# EAGLE board Logic_Level_Converter-GiantPanel-v13 (EAGLE 6.4), part 1 of 9
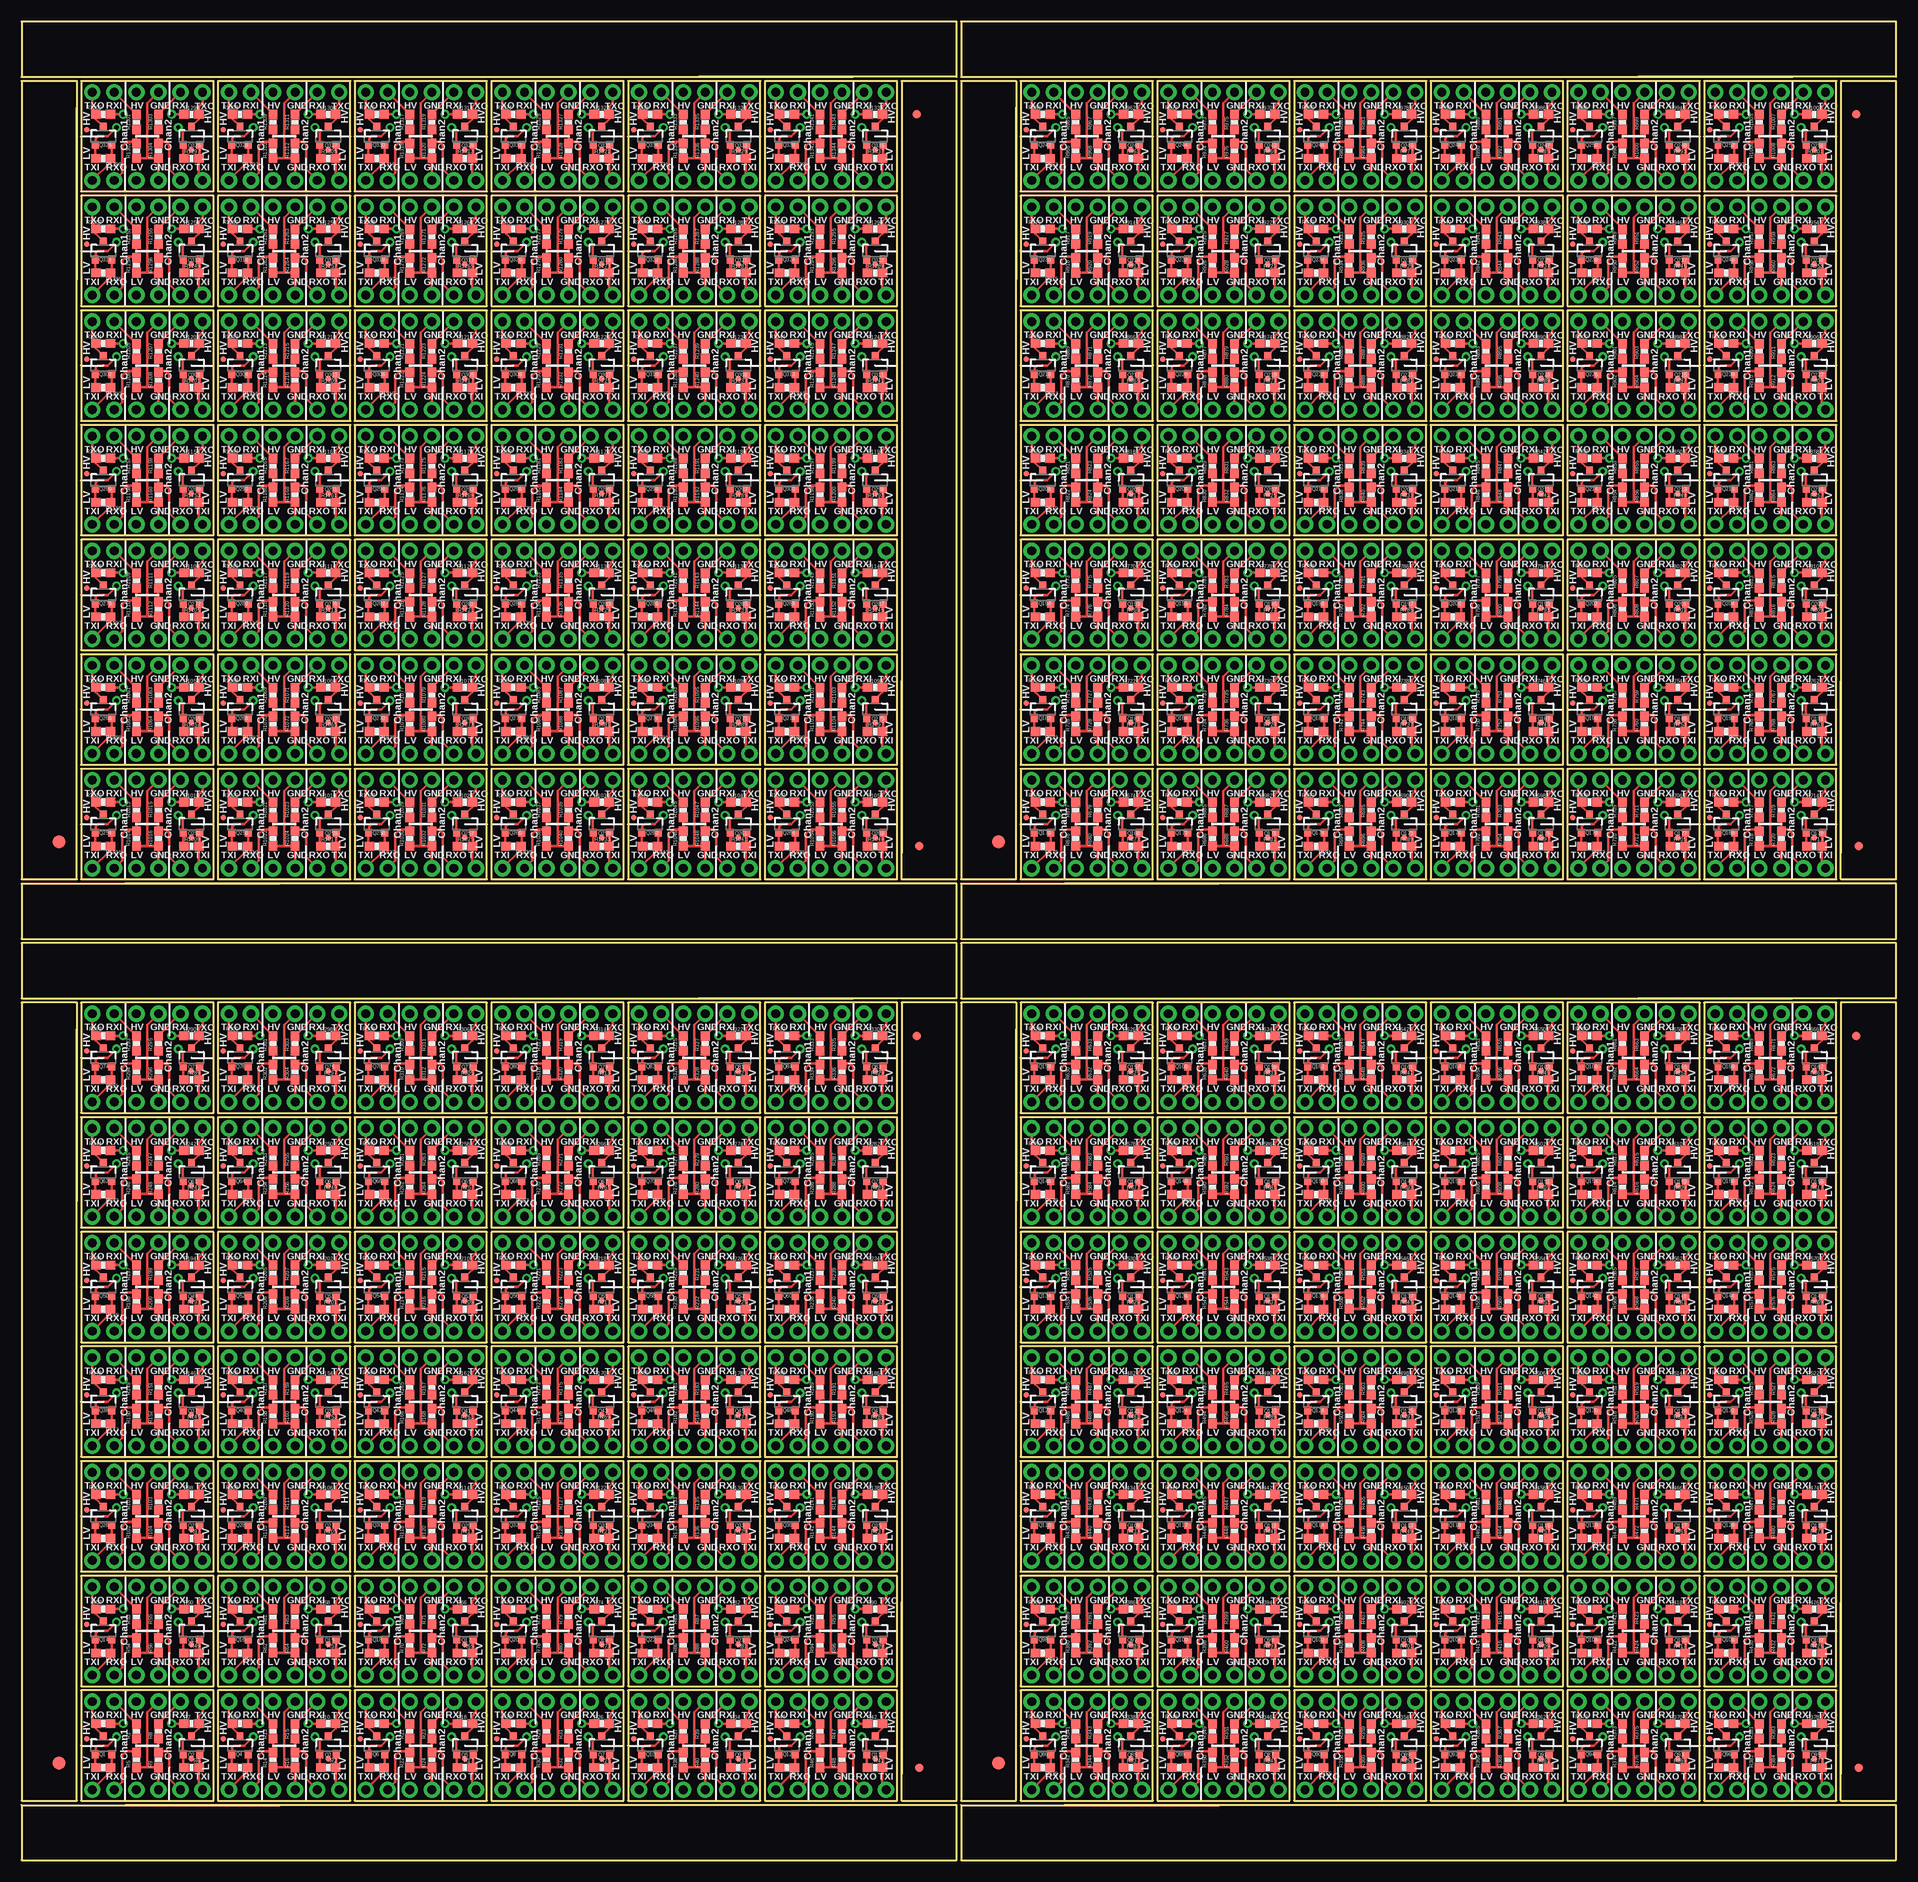
[diagram p0: board, top side]
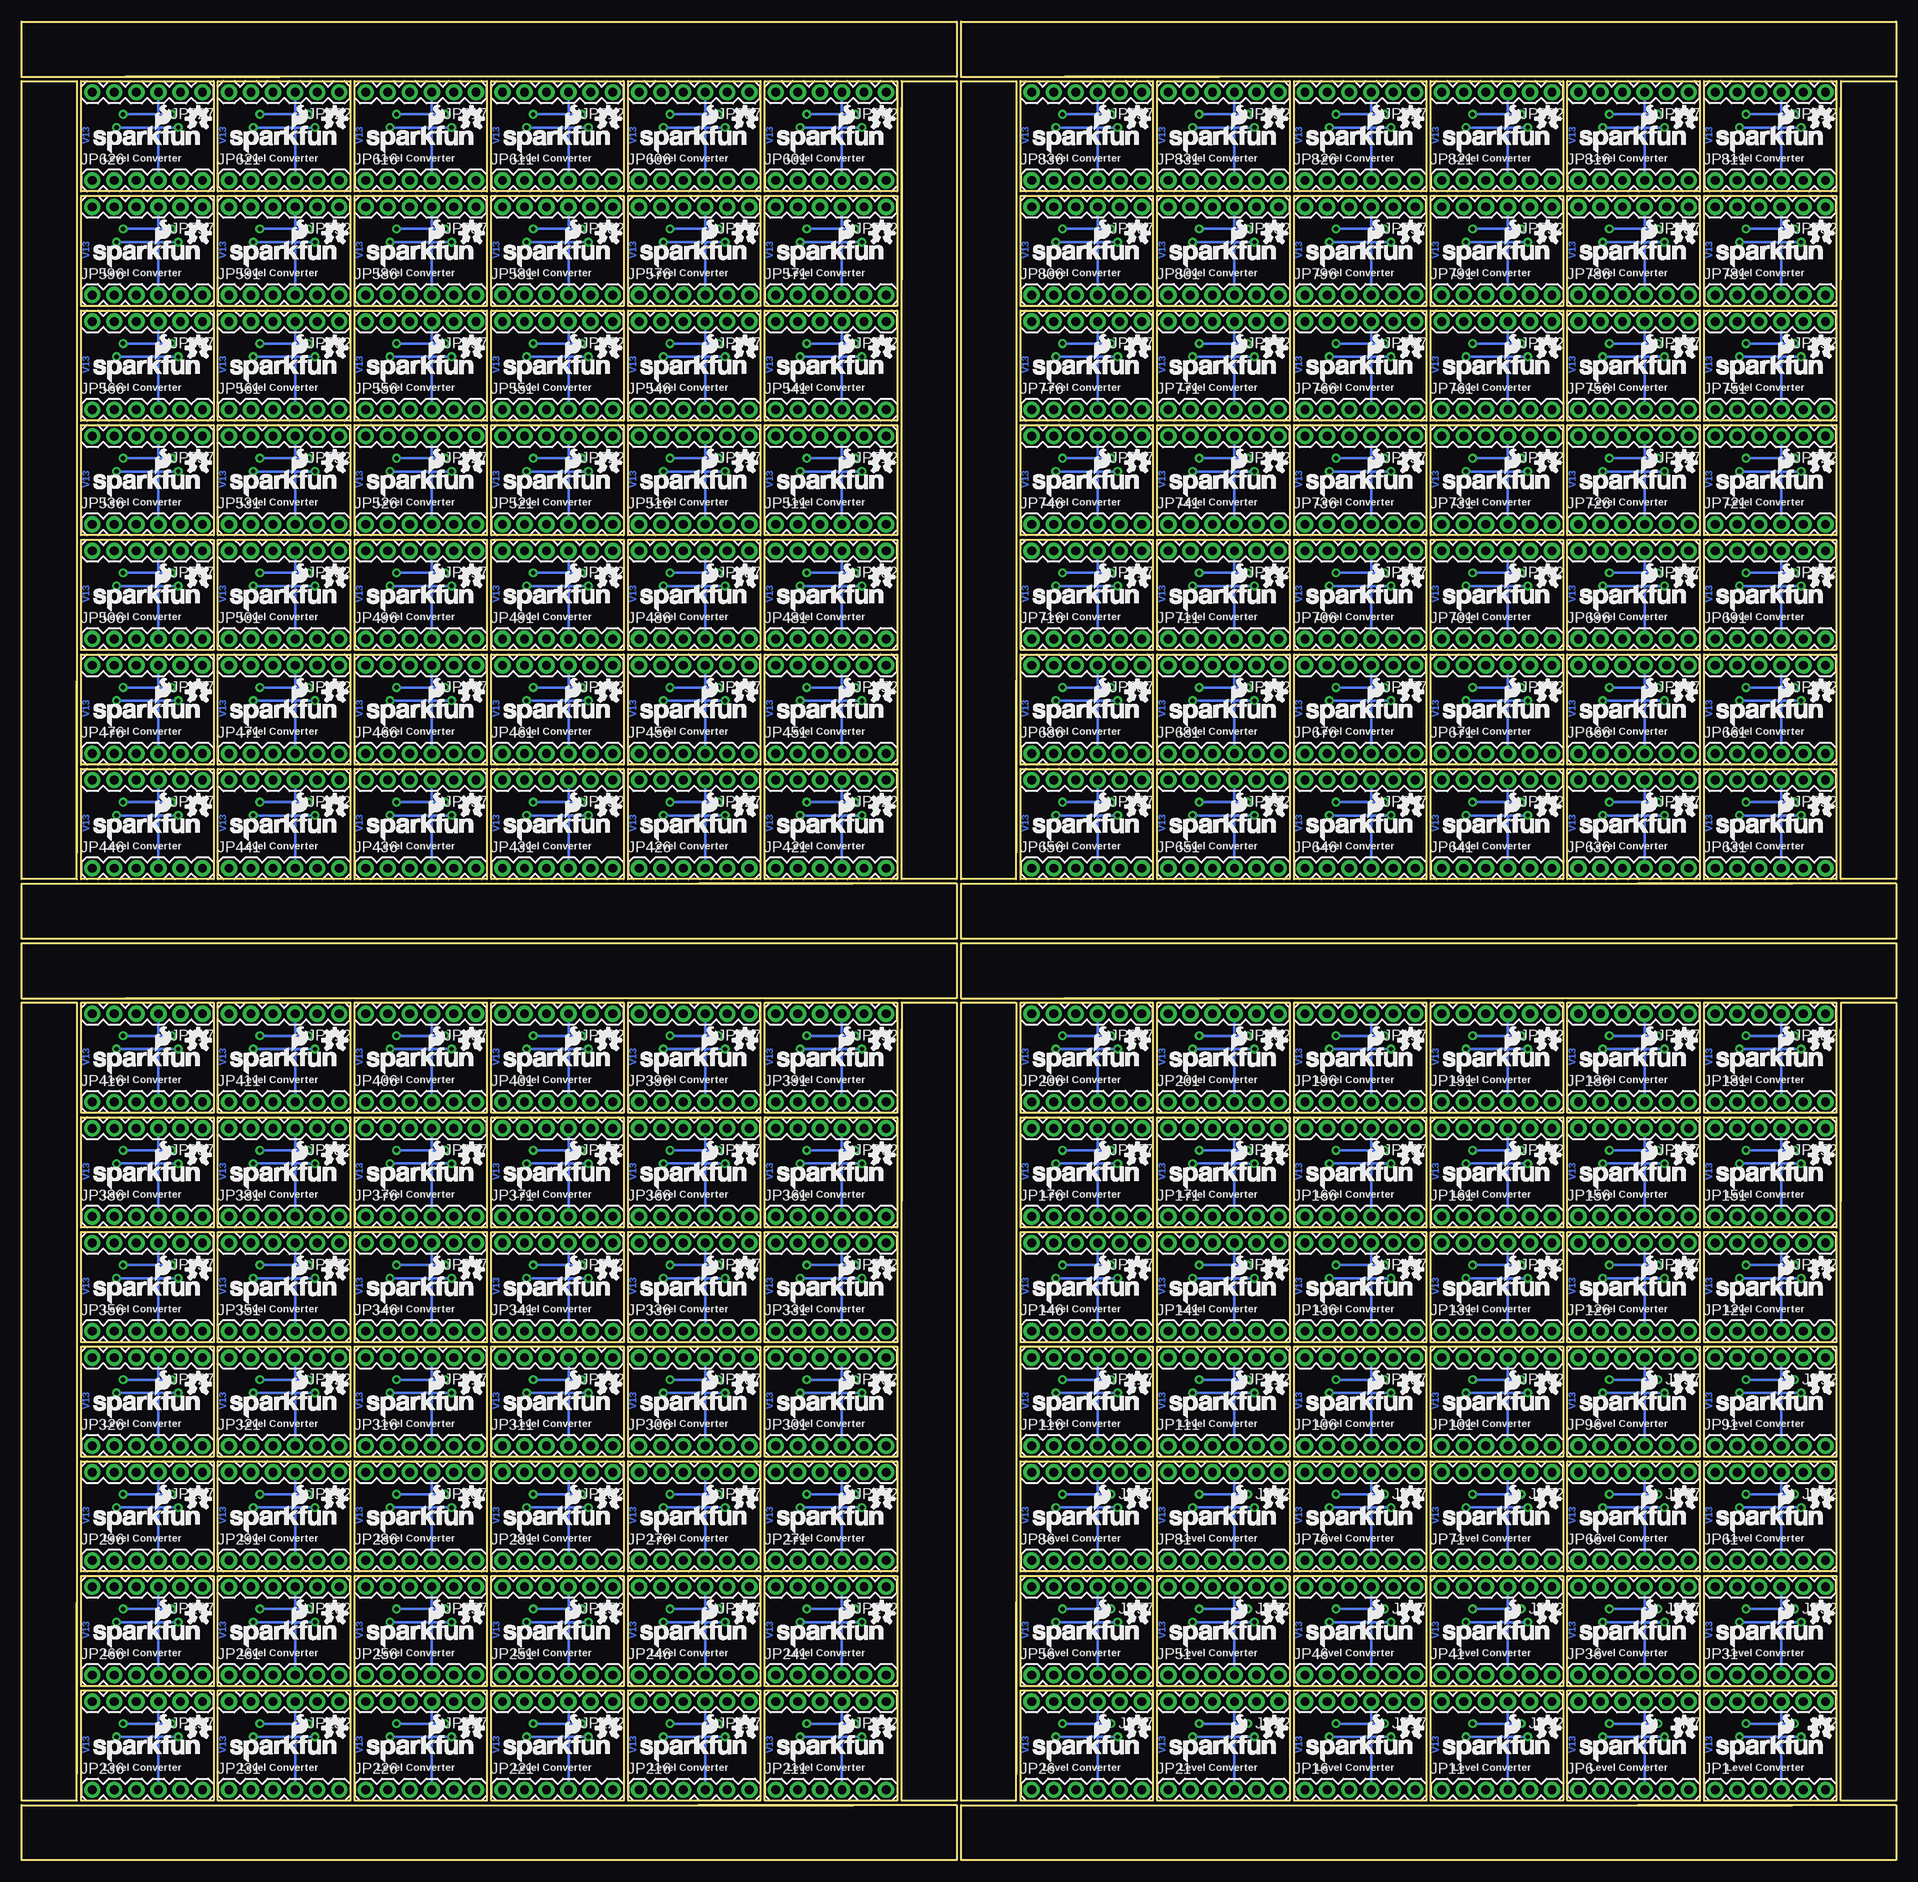
[diagram p1: board, bottom side, seen from below]

Size 215.9 x 211.84 mm. Coordinates in mm from the lower left corner, seen from the top.
Outline: 752 segments
Copper layers (1*16): Top 0.035mm / dielectric 1.5mm / Bottom 0.035mm
Design rules "SparkFun *": minimum track width 7mil, minimum drill 15mil, track to track 8mil, track to pad 8mil, pad to pad 8mil, via to via 8mil, smd to smd 8mil, copper to edge 8mil, drill to drill 8mil, minimum pad ring 12mil, minimum via ring 10mil, stop-mask expansion 4mil, vias tented up to drill 20mil, thermal gap 10mil

## Footprints (pad centres in the part's own frame; a part is rotated, then mirrored left to right if it is on the bottom)
FIDUCIAL-1.5X3 = smd 1.5 x 1.5: 1 0,0
FIDUCIAL-1X2 = smd 1 x 1: 1 0,0
1X06 = drill 1.016 pad 1.88: 1 0,0; 2 2.54,0; 3 5.08,0; 4 7.62,0; 5 10.16,0; 6 12.7,0
MICRO-FIDUCIAL = smd 0.635 x 0.635: 1 0,0
SOT23-3 = smd 0.8 x 0.9: 1 -0.95,-1; 2 0.95,-1; 3 0,1.1
0603-RES = smd 1.1 x 1: 1 -0.85,0; 2 0.85,0

## Placement (x,y rotation side)
E$1  [FIDUCIAL-1.5X3]  4.32,11.18 0 top
E$2  [FIDUCIAL-1X2]  211.58,10.67 0 top
E$3  [FIDUCIAL-1X2]  211.33,95 180 top
E$4  [FIDUCIAL-1X2]  103.38,10.67 0 top
E$5  [FIDUCIAL-1X2]  103.12,95 180 top
E$6  [FIDUCIAL-1.5X3]  112.52,11.18 0 top
E$7  [FIDUCIAL-1X2]  211.58,116.84 0 top
E$8  [FIDUCIAL-1X2]  211.33,201.17 180 top
E$9  [FIDUCIAL-1.5X3]  112.52,117.35 0 top
E$10  [FIDUCIAL-1X2]  103.38,116.84 0 top
E$11  [FIDUCIAL-1X2]  103.12,201.17 180 top
E$12  [FIDUCIAL-1.5X3]  4.32,117.35 0 top
JP1  [1X06]  20.83,8.13 0 bottom
JP2  [1X06]  8.13,18.29 180 bottom
JP3  FIDUCIALUFIDUCIAL  [MICRO-FIDUCIAL]  19.56,11.68 0 top
JP4  FIDUCIALUFIDUCIAL  [MICRO-FIDUCIAL]  7.49,13.97 0 top
JP5  LOGO-SFENW2  [SFE-NEW-WEB]  20.7,11.3 0 bottom
JP6  [1X06]  36.58,8.13 0 bottom
JP7  [1X06]  23.88,18.29 180 bottom
JP8  FIDUCIALUFIDUCIAL  [MICRO-FIDUCIAL]  35.31,11.68 0 top
JP9  FIDUCIALUFIDUCIAL  [MICRO-FIDUCIAL]  23.24,13.97 0 top
JP10  LOGO-SFENW2  [SFE-NEW-WEB]  36.45,11.3 0 bottom
JP11  [1X06]  52.32,8.13 0 bottom
JP12  [1X06]  39.62,18.29 180 bottom
JP13  FIDUCIALUFIDUCIAL  [MICRO-FIDUCIAL]  51.05,11.68 0 top
JP14  FIDUCIALUFIDUCIAL  [MICRO-FIDUCIAL]  38.99,13.97 0 top
JP15  LOGO-SFENW2  [SFE-NEW-WEB]  52.2,11.3 0 bottom
JP16  [1X06]  68.07,8.13 0 bottom
JP17  [1X06]  55.37,18.29 180 bottom
JP18  FIDUCIALUFIDUCIAL  [MICRO-FIDUCIAL]  66.8,11.68 0 top
JP19  FIDUCIALUFIDUCIAL  [MICRO-FIDUCIAL]  54.74,13.97 0 top
JP20  LOGO-SFENW2  [SFE-NEW-WEB]  67.94,11.3 0 bottom
JP21  [1X06]  83.82,8.13 0 bottom
JP22  [1X06]  71.12,18.29 180 bottom
JP23  FIDUCIALUFIDUCIAL  [MICRO-FIDUCIAL]  82.55,11.68 0 top
JP24  FIDUCIALUFIDUCIAL  [MICRO-FIDUCIAL]  70.48,13.97 0 top
JP25  LOGO-SFENW2  [SFE-NEW-WEB]  83.69,11.3 0 bottom
JP26  [1X06]  99.57,8.13 0 bottom
JP27  [1X06]  86.87,18.29 180 bottom
JP28  FIDUCIALUFIDUCIAL  [MICRO-FIDUCIAL]  98.3,11.68 0 top
JP29  FIDUCIALUFIDUCIAL  [MICRO-FIDUCIAL]  86.23,13.97 0 top
JP30  LOGO-SFENW2  [SFE-NEW-WEB]  99.44,11.3 0 bottom
JP31  [1X06]  20.83,21.34 0 bottom
JP32  [1X06]  8.13,31.5 180 bottom
JP33  FIDUCIALUFIDUCIAL  [MICRO-FIDUCIAL]  19.56,24.89 0 top
JP34  FIDUCIALUFIDUCIAL  [MICRO-FIDUCIAL]  7.49,27.18 0 top
JP35  LOGO-SFENW2  [SFE-NEW-WEB]  20.7,24.51 0 bottom
JP36  [1X06]  36.58,21.34 0 bottom
JP37  [1X06]  23.88,31.5 180 bottom
JP38  FIDUCIALUFIDUCIAL  [MICRO-FIDUCIAL]  35.31,24.89 0 top
JP39  FIDUCIALUFIDUCIAL  [MICRO-FIDUCIAL]  23.24,27.18 0 top
JP40  LOGO-SFENW2  [SFE-NEW-WEB]  36.45,24.51 0 bottom
JP41  [1X06]  52.32,21.34 0 bottom
JP42  [1X06]  39.62,31.5 180 bottom
JP43  FIDUCIALUFIDUCIAL  [MICRO-FIDUCIAL]  51.05,24.89 0 top
JP44  FIDUCIALUFIDUCIAL  [MICRO-FIDUCIAL]  38.99,27.18 0 top
JP45  LOGO-SFENW2  [SFE-NEW-WEB]  52.2,24.51 0 bottom
JP46  [1X06]  68.07,21.34 0 bottom
JP47  [1X06]  55.37,31.5 180 bottom
JP48  FIDUCIALUFIDUCIAL  [MICRO-FIDUCIAL]  66.8,24.89 0 top
JP49  FIDUCIALUFIDUCIAL  [MICRO-FIDUCIAL]  54.74,27.18 0 top
JP50  LOGO-SFENW2  [SFE-NEW-WEB]  67.94,24.51 0 bottom
JP51  [1X06]  83.82,21.34 0 bottom
JP52  [1X06]  71.12,31.5 180 bottom
JP53  FIDUCIALUFIDUCIAL  [MICRO-FIDUCIAL]  82.55,24.89 0 top
JP54  FIDUCIALUFIDUCIAL  [MICRO-FIDUCIAL]  70.48,27.18 0 top
JP55  LOGO-SFENW2  [SFE-NEW-WEB]  83.69,24.51 0 bottom
JP56  [1X06]  99.57,21.34 0 bottom
JP57  [1X06]  86.87,31.5 180 bottom
JP58  FIDUCIALUFIDUCIAL  [MICRO-FIDUCIAL]  98.3,24.89 0 top
JP59  FIDUCIALUFIDUCIAL  [MICRO-FIDUCIAL]  86.23,27.18 0 top
JP60  LOGO-SFENW2  [SFE-NEW-WEB]  99.44,24.51 0 bottom
JP61  [1X06]  20.83,34.54 0 bottom
JP62  [1X06]  8.13,44.7 180 bottom
JP63  FIDUCIALUFIDUCIAL  [MICRO-FIDUCIAL]  19.56,38.1 0 top
JP64  FIDUCIALUFIDUCIAL  [MICRO-FIDUCIAL]  7.49,40.39 0 top
JP65  LOGO-SFENW2  [SFE-NEW-WEB]  20.7,37.72 0 bottom
JP66  [1X06]  36.58,34.54 0 bottom
JP67  [1X06]  23.88,44.7 180 bottom
JP68  FIDUCIALUFIDUCIAL  [MICRO-FIDUCIAL]  35.31,38.1 0 top
JP69  FIDUCIALUFIDUCIAL  [MICRO-FIDUCIAL]  23.24,40.39 0 top
JP70  LOGO-SFENW2  [SFE-NEW-WEB]  36.45,37.72 0 bottom
JP71  [1X06]  52.32,34.54 0 bottom
JP72  [1X06]  39.62,44.7 180 bottom
JP73  FIDUCIALUFIDUCIAL  [MICRO-FIDUCIAL]  51.05,38.1 0 top
JP74  FIDUCIALUFIDUCIAL  [MICRO-FIDUCIAL]  38.99,40.39 0 top
JP75  LOGO-SFENW2  [SFE-NEW-WEB]  52.2,37.72 0 bottom
JP76  [1X06]  68.07,34.54 0 bottom
JP77  [1X06]  55.37,44.7 180 bottom
JP78  FIDUCIALUFIDUCIAL  [MICRO-FIDUCIAL]  66.8,38.1 0 top
JP79  FIDUCIALUFIDUCIAL  [MICRO-FIDUCIAL]  54.74,40.39 0 top
JP80  LOGO-SFENW2  [SFE-NEW-WEB]  67.94,37.72 0 bottom
JP81  [1X06]  83.82,34.54 0 bottom
JP82  [1X06]  71.12,44.7 180 bottom
JP83  FIDUCIALUFIDUCIAL  [MICRO-FIDUCIAL]  82.55,38.1 0 top
JP84  FIDUCIALUFIDUCIAL  [MICRO-FIDUCIAL]  70.48,40.39 0 top
JP85  LOGO-SFENW2  [SFE-NEW-WEB]  83.69,37.72 0 bottom
JP86  [1X06]  99.57,34.54 0 bottom
JP87  [1X06]  86.87,44.7 180 bottom
JP88  FIDUCIALUFIDUCIAL  [MICRO-FIDUCIAL]  98.3,38.1 0 top
JP89  FIDUCIALUFIDUCIAL  [MICRO-FIDUCIAL]  86.23,40.39 0 top
JP90  LOGO-SFENW2  [SFE-NEW-WEB]  99.44,37.72 0 bottom
JP91  [1X06]  20.83,47.75 0 bottom
JP92  [1X06]  8.13,57.91 180 bottom
JP93  FIDUCIALUFIDUCIAL  [MICRO-FIDUCIAL]  19.56,51.31 0 top
JP94  FIDUCIALUFIDUCIAL  [MICRO-FIDUCIAL]  7.49,53.59 0 top
JP95  LOGO-SFENW2  [SFE-NEW-WEB]  20.7,50.93 0 bottom
JP96  [1X06]  36.58,47.75 0 bottom
JP97  [1X06]  23.88,57.91 180 bottom
JP98  FIDUCIALUFIDUCIAL  [MICRO-FIDUCIAL]  35.31,51.31 0 top
JP99  FIDUCIALUFIDUCIAL  [MICRO-FIDUCIAL]  23.24,53.59 0 top
JP100  LOGO-SFENW2  [SFE-NEW-WEB]  36.45,50.93 0 bottom
JP101  [1X06]  52.32,47.75 0 bottom
JP102  [1X06]  39.62,57.91 180 bottom
JP103  FIDUCIALUFIDUCIAL  [MICRO-FIDUCIAL]  51.05,51.31 0 top
JP104  FIDUCIALUFIDUCIAL  [MICRO-FIDUCIAL]  38.99,53.59 0 top
JP105  LOGO-SFENW2  [SFE-NEW-WEB]  52.2,50.93 0 bottom
JP106  [1X06]  68.07,47.75 0 bottom
JP107  [1X06]  55.37,57.91 180 bottom
JP108  FIDUCIALUFIDUCIAL  [MICRO-FIDUCIAL]  66.8,51.31 0 top
JP109  FIDUCIALUFIDUCIAL  [MICRO-FIDUCIAL]  54.74,53.59 0 top
JP110  LOGO-SFENW2  [SFE-NEW-WEB]  67.94,50.93 0 bottom
JP111  [1X06]  83.82,47.75 0 bottom
JP112  [1X06]  71.12,57.91 180 bottom
JP113  FIDUCIALUFIDUCIAL  [MICRO-FIDUCIAL]  82.55,51.31 0 top
JP114  FIDUCIALUFIDUCIAL  [MICRO-FIDUCIAL]  70.48,53.59 0 top
JP115  LOGO-SFENW2  [SFE-NEW-WEB]  83.69,50.93 0 bottom
JP116  [1X06]  99.57,47.75 0 bottom
JP117  [1X06]  86.87,57.91 180 bottom
JP118  FIDUCIALUFIDUCIAL  [MICRO-FIDUCIAL]  98.3,51.31 0 top
JP119  FIDUCIALUFIDUCIAL  [MICRO-FIDUCIAL]  86.23,53.59 0 top
JP120  LOGO-SFENW2  [SFE-NEW-WEB]  99.44,50.93 0 bottom
JP121  [1X06]  20.83,60.96 0 bottom
JP122  [1X06]  8.13,71.12 180 bottom
JP123  FIDUCIALUFIDUCIAL  [MICRO-FIDUCIAL]  19.56,64.52 0 top
JP124  FIDUCIALUFIDUCIAL  [MICRO-FIDUCIAL]  7.49,66.8 0 top
JP125  LOGO-SFENW2  [SFE-NEW-WEB]  20.7,64.14 0 bottom
JP126  [1X06]  36.58,60.96 0 bottom
JP127  [1X06]  23.88,71.12 180 bottom
JP128  FIDUCIALUFIDUCIAL  [MICRO-FIDUCIAL]  35.31,64.52 0 top
JP129  FIDUCIALUFIDUCIAL  [MICRO-FIDUCIAL]  23.24,66.8 0 top
JP130  LOGO-SFENW2  [SFE-NEW-WEB]  36.45,64.14 0 bottom
JP131  [1X06]  52.32,60.96 0 bottom
JP132  [1X06]  39.62,71.12 180 bottom
JP133  FIDUCIALUFIDUCIAL  [MICRO-FIDUCIAL]  51.05,64.52 0 top
JP134  FIDUCIALUFIDUCIAL  [MICRO-FIDUCIAL]  38.99,66.8 0 top
JP135  LOGO-SFENW2  [SFE-NEW-WEB]  52.2,64.14 0 bottom
JP136  [1X06]  68.07,60.96 0 bottom
JP137  [1X06]  55.37,71.12 180 bottom
JP138  FIDUCIALUFIDUCIAL  [MICRO-FIDUCIAL]  66.8,64.52 0 top
JP139  FIDUCIALUFIDUCIAL  [MICRO-FIDUCIAL]  54.74,66.8 0 top
JP140  LOGO-SFENW2  [SFE-NEW-WEB]  67.94,64.14 0 bottom
JP141  [1X06]  83.82,60.96 0 bottom
JP142  [1X06]  71.12,71.12 180 bottom
JP143  FIDUCIALUFIDUCIAL  [MICRO-FIDUCIAL]  82.55,64.52 0 top
JP144  FIDUCIALUFIDUCIAL  [MICRO-FIDUCIAL]  70.48,66.8 0 top
JP145  LOGO-SFENW2  [SFE-NEW-WEB]  83.69,64.14 0 bottom
JP146  [1X06]  99.57,60.96 0 bottom
JP147  [1X06]  86.87,71.12 180 bottom
JP148  FIDUCIALUFIDUCIAL  [MICRO-FIDUCIAL]  98.3,64.52 0 top
JP149  FIDUCIALUFIDUCIAL  [MICRO-FIDUCIAL]  86.23,66.8 0 top
JP150  LOGO-SFENW2  [SFE-NEW-WEB]  99.44,64.14 0 bottom
JP151  [1X06]  20.83,74.17 0 bottom
JP152  [1X06]  8.13,84.33 180 bottom
JP153  FIDUCIALUFIDUCIAL  [MICRO-FIDUCIAL]  19.56,77.72 0 top
JP154  FIDUCIALUFIDUCIAL  [MICRO-FIDUCIAL]  7.49,80.01 0 top
JP155  LOGO-SFENW2  [SFE-NEW-WEB]  20.7,77.34 0 bottom
JP156  [1X06]  36.58,74.17 0 bottom
JP157  [1X06]  23.88,84.33 180 bottom
JP158  FIDUCIALUFIDUCIAL  [MICRO-FIDUCIAL]  35.31,77.72 0 top
JP159  FIDUCIALUFIDUCIAL  [MICRO-FIDUCIAL]  23.24,80.01 0 top
JP160  LOGO-SFENW2  [SFE-NEW-WEB]  36.45,77.34 0 bottom
JP161  [1X06]  52.32,74.17 0 bottom
JP162  [1X06]  39.62,84.33 180 bottom
JP163  FIDUCIALUFIDUCIAL  [MICRO-FIDUCIAL]  51.05,77.72 0 top
JP164  FIDUCIALUFIDUCIAL  [MICRO-FIDUCIAL]  38.99,80.01 0 top
JP165  LOGO-SFENW2  [SFE-NEW-WEB]  52.2,77.34 0 bottom
JP166  [1X06]  68.07,74.17 0 bottom
JP167  [1X06]  55.37,84.33 180 bottom
JP168  FIDUCIALUFIDUCIAL  [MICRO-FIDUCIAL]  66.8,77.72 0 top
JP169  FIDUCIALUFIDUCIAL  [MICRO-FIDUCIAL]  54.74,80.01 0 top
JP170  LOGO-SFENW2  [SFE-NEW-WEB]  67.94,77.34 0 bottom
JP171  [1X06]  83.82,74.17 0 bottom
JP172  [1X06]  71.12,84.33 180 bottom
JP173  FIDUCIALUFIDUCIAL  [MICRO-FIDUCIAL]  82.55,77.72 0 top
JP174  FIDUCIALUFIDUCIAL  [MICRO-FIDUCIAL]  70.48,80.01 0 top
JP175  LOGO-SFENW2  [SFE-NEW-WEB]  83.69,77.34 0 bottom
JP176  [1X06]  99.57,74.17 0 bottom
JP177  [1X06]  86.87,84.33 180 bottom
JP178  FIDUCIALUFIDUCIAL  [MICRO-FIDUCIAL]  98.3,77.72 0 top
JP179  FIDUCIALUFIDUCIAL  [MICRO-FIDUCIAL]  86.23,80.01 0 top
JP180  LOGO-SFENW2  [SFE-NEW-WEB]  99.44,77.34 0 bottom
JP181  [1X06]  20.83,87.38 0 bottom
JP182  [1X06]  8.13,97.54 180 bottom
JP183  FIDUCIALUFIDUCIAL  [MICRO-FIDUCIAL]  19.56,90.93 0 top
JP184  FIDUCIALUFIDUCIAL  [MICRO-FIDUCIAL]  7.49,93.22 0 top
JP185  LOGO-SFENW2  [SFE-NEW-WEB]  20.7,90.55 0 bottom
JP186  [1X06]  36.58,87.38 0 bottom
JP187  [1X06]  23.88,97.54 180 bottom
JP188  FIDUCIALUFIDUCIAL  [MICRO-FIDUCIAL]  35.31,90.93 0 top
JP189  FIDUCIALUFIDUCIAL  [MICRO-FIDUCIAL]  23.24,93.22 0 top
JP190  LOGO-SFENW2  [SFE-NEW-WEB]  36.45,90.55 0 bottom
JP191  [1X06]  52.32,87.38 0 bottom
JP192  [1X06]  39.62,97.54 180 bottom
JP193  FIDUCIALUFIDUCIAL  [MICRO-FIDUCIAL]  51.05,90.93 0 top
JP194  FIDUCIALUFIDUCIAL  [MICRO-FIDUCIAL]  38.99,93.22 0 top
JP195  LOGO-SFENW2  [SFE-NEW-WEB]  52.2,90.55 0 bottom
JP196  [1X06]  68.07,87.38 0 bottom
JP197  [1X06]  55.37,97.54 180 bottom
JP198  FIDUCIALUFIDUCIAL  [MICRO-FIDUCIAL]  66.8,90.93 0 top
JP199  FIDUCIALUFIDUCIAL  [MICRO-FIDUCIAL]  54.74,93.22 0 top
JP200  LOGO-SFENW2  [SFE-NEW-WEB]  67.94,90.55 0 bottom
JP201  [1X06]  83.82,87.38 0 bottom
JP202  [1X06]  71.12,97.54 180 bottom
JP203  FIDUCIALUFIDUCIAL  [MICRO-FIDUCIAL]  82.55,90.93 0 top
JP204  FIDUCIALUFIDUCIAL  [MICRO-FIDUCIAL]  70.48,93.22 0 top
JP205  LOGO-SFENW2  [SFE-NEW-WEB]  83.69,90.55 0 bottom
JP206  [1X06]  99.57,87.38 0 bottom
JP207  [1X06]  86.87,97.54 180 bottom
JP208  FIDUCIALUFIDUCIAL  [MICRO-FIDUCIAL]  98.3,90.93 0 top
JP209  FIDUCIALUFIDUCIAL  [MICRO-FIDUCIAL]  86.23,93.22 0 top
JP210  LOGO-SFENW2  [SFE-NEW-WEB]  99.44,90.55 0 bottom
JP211  [1X06]  129.03,8.13 0 bottom
JP212  [1X06]  116.33,18.29 180 bottom
JP213  FIDUCIALUFIDUCIAL  [MICRO-FIDUCIAL]  127.76,11.68 0 top
JP214  FIDUCIALUFIDUCIAL  [MICRO-FIDUCIAL]  115.7,13.97 0 top
JP215  LOGO-SFENW2  [SFE-NEW-WEB]  128.91,11.3 0 bottom
JP216  [1X06]  144.78,8.13 0 bottom
JP217  [1X06]  132.08,18.29 180 bottom
JP218  FIDUCIALUFIDUCIAL  [MICRO-FIDUCIAL]  143.51,11.68 0 top
JP219  FIDUCIALUFIDUCIAL  [MICRO-FIDUCIAL]  131.44,13.97 0 top
JP220  LOGO-SFENW2  [SFE-NEW-WEB]  144.65,11.3 0 bottom
JP221  [1X06]  160.53,8.13 0 bottom
JP222  [1X06]  147.83,18.29 180 bottom
JP223  FIDUCIALUFIDUCIAL  [MICRO-FIDUCIAL]  159.26,11.68 0 top
JP224  FIDUCIALUFIDUCIAL  [MICRO-FIDUCIAL]  147.19,13.97 0 top
JP225  LOGO-SFENW2  [SFE-NEW-WEB]  160.4,11.3 0 bottom
JP226  [1X06]  176.28,8.13 0 bottom
JP227  [1X06]  163.58,18.29 180 bottom
JP228  FIDUCIALUFIDUCIAL  [MICRO-FIDUCIAL]  175.01,11.68 0 top
JP229  FIDUCIALUFIDUCIAL  [MICRO-FIDUCIAL]  162.94,13.97 0 top
JP230  LOGO-SFENW2  [SFE-NEW-WEB]  176.15,11.3 0 bottom
JP231  [1X06]  192.02,8.13 0 bottom
JP232  [1X06]  179.32,18.29 180 bottom
JP233  FIDUCIALUFIDUCIAL  [MICRO-FIDUCIAL]  190.75,11.68 0 top
JP234  FIDUCIALUFIDUCIAL  [MICRO-FIDUCIAL]  178.69,13.97 0 top
JP235  LOGO-SFENW2  [SFE-NEW-WEB]  191.9,11.3 0 bottom
JP236  [1X06]  207.77,8.13 0 bottom
JP237  [1X06]  195.07,18.29 180 bottom
JP238  FIDUCIALUFIDUCIAL  [MICRO-FIDUCIAL]  206.5,11.68 0 top
JP239  FIDUCIALUFIDUCIAL  [MICRO-FIDUCIAL]  194.44,13.97 0 top
JP240  LOGO-SFENW2  [SFE-NEW-WEB]  207.65,11.3 0 bottom
JP241  [1X06]  129.03,21.34 0 bottom
JP242  [1X06]  116.33,31.5 180 bottom
JP243  FIDUCIALUFIDUCIAL  [MICRO-FIDUCIAL]  127.76,24.89 0 top
JP244  FIDUCIALUFIDUCIAL  [MICRO-FIDUCIAL]  115.7,27.18 0 top
JP245  LOGO-SFENW2  [SFE-NEW-WEB]  128.91,24.51 0 bottom
JP246  [1X06]  144.78,21.34 0 bottom
JP247  [1X06]  132.08,31.5 180 bottom
JP248  FIDUCIALUFIDUCIAL  [MICRO-FIDUCIAL]  143.51,24.89 0 top
JP249  FIDUCIALUFIDUCIAL  [MICRO-FIDUCIAL]  131.44,27.18 0 top
JP250  LOGO-SFENW2  [SFE-NEW-WEB]  144.65,24.51 0 bottom
JP251  [1X06]  160.53,21.34 0 bottom
JP252  [1X06]  147.83,31.5 180 bottom
JP253  FIDUCIALUFIDUCIAL  [MICRO-FIDUCIAL]  159.26,24.89 0 top
JP254  FIDUCIALUFIDUCIAL  [MICRO-FIDUCIAL]  147.19,27.18 0 top
JP255  LOGO-SFENW2  [SFE-NEW-WEB]  160.4,24.51 0 bottom
JP256  [1X06]  176.28,21.34 0 bottom
JP257  [1X06]  163.58,31.5 180 bottom
JP258  FIDUCIALUFIDUCIAL  [MICRO-FIDUCIAL]  175.01,24.89 0 top
JP259  FIDUCIALUFIDUCIAL  [MICRO-FIDUCIAL]  162.94,27.18 0 top
JP260  LOGO-SFENW2  [SFE-NEW-WEB]  176.15,24.51 0 bottom
JP261  [1X06]  192.02,21.34 0 bottom
JP262  [1X06]  179.32,31.5 180 bottom
JP263  FIDUCIALUFIDUCIAL  [MICRO-FIDUCIAL]  190.75,24.89 0 top
JP264  FIDUCIALUFIDUCIAL  [MICRO-FIDUCIAL]  178.69,27.18 0 top
JP265  LOGO-SFENW2  [SFE-NEW-WEB]  191.9,24.51 0 bottom
JP266  [1X06]  207.77,21.34 0 bottom
JP267  [1X06]  195.07,31.5 180 bottom
JP268  FIDUCIALUFIDUCIAL  [MICRO-FIDUCIAL]  206.5,24.89 0 top
JP269  FIDUCIALUFIDUCIAL  [MICRO-FIDUCIAL]  194.44,27.18 0 top
JP270  LOGO-SFENW2  [SFE-NEW-WEB]  207.65,24.51 0 bottom
JP271  [1X06]  129.03,34.54 0 bottom
JP272  [1X06]  116.33,44.7 180 bottom
JP273  FIDUCIALUFIDUCIAL  [MICRO-FIDUCIAL]  127.76,38.1 0 top
JP274  FIDUCIALUFIDUCIAL  [MICRO-FIDUCIAL]  115.7,40.39 0 top
JP275  LOGO-SFENW2  [SFE-NEW-WEB]  128.91,37.72 0 bottom
JP276  [1X06]  144.78,34.54 0 bottom
JP277  [1X06]  132.08,44.7 180 bottom
JP278  FIDUCIALUFIDUCIAL  [MICRO-FIDUCIAL]  143.51,38.1 0 top
JP279  FIDUCIALUFIDUCIAL  [MICRO-FIDUCIAL]  131.44,40.39 0 top
JP280  LOGO-SFENW2  [SFE-NEW-WEB]  144.65,37.72 0 bottom
JP281  [1X06]  160.53,34.54 0 bottom
JP282  [1X06]  147.83,44.7 180 bottom
JP283  FIDUCIALUFIDUCIAL  [MICRO-FIDUCIAL]  159.26,38.1 0 top
JP284  FIDUCIALUFIDUCIAL  [MICRO-FIDUCIAL]  147.19,40.39 0 top
JP285  LOGO-SFENW2  [SFE-NEW-WEB]  160.4,37.72 0 bottom
JP286  [1X06]  176.28,34.54 0 bottom
JP287  [1X06]  163.58,44.7 180 bottom
JP288  FIDUCIALUFIDUCIAL  [MICRO-FIDUCIAL]  175.01,38.1 0 top
JP289  FIDUCIALUFIDUCIAL  [MICRO-FIDUCIAL]  162.94,40.39 0 top
JP290  LOGO-SFENW2  [SFE-NEW-WEB]  176.15,37.72 0 bottom
JP291  [1X06]  192.02,34.54 0 bottom
JP292  [1X06]  179.32,44.7 180 bottom
JP293  FIDUCIALUFIDUCIAL  [MICRO-FIDUCIAL]  190.75,38.1 0 top
JP294  FIDUCIALUFIDUCIAL  [MICRO-FIDUCIAL]  178.69,40.39 0 top
JP295  LOGO-SFENW2  [SFE-NEW-WEB]  191.9,37.72 0 bottom
JP296  [1X06]  207.77,34.54 0 bottom
JP297  [1X06]  195.07,44.7 180 bottom
JP298  FIDUCIALUFIDUCIAL  [MICRO-FIDUCIAL]  206.5,38.1 0 top
JP299  FIDUCIALUFIDUCIAL  [MICRO-FIDUCIAL]  194.44,40.39 0 top
JP300  LOGO-SFENW2  [SFE-NEW-WEB]  207.65,37.72 0 bottom
JP301  [1X06]  129.03,47.75 0 bottom
JP302  [1X06]  116.33,57.91 180 bottom
JP303  FIDUCIALUFIDUCIAL  [MICRO-FIDUCIAL]  127.76,51.31 0 top
JP304  FIDUCIALUFIDUCIAL  [MICRO-FIDUCIAL]  115.7,53.59 0 top
JP305  LOGO-SFENW2  [SFE-NEW-WEB]  128.91,50.93 0 bottom
JP306  [1X06]  144.78,47.75 0 bottom
JP307  [1X06]  132.08,57.91 180 bottom
JP308  FIDUCIALUFIDUCIAL  [MICRO-FIDUCIAL]  143.51,51.31 0 top
JP309  FIDUCIALUFIDUCIAL  [MICRO-FIDUCIAL]  131.44,53.59 0 top
JP310  LOGO-SFENW2  [SFE-NEW-WEB]  144.65,50.93 0 bottom
JP311  [1X06]  160.53,47.75 0 bottom
JP312  [1X06]  147.83,57.91 180 bottom
JP313  FIDUCIALUFIDUCIAL  [MICRO-FIDUCIAL]  159.26,51.31 0 top
JP314  FIDUCIALUFIDUCIAL  [MICRO-FIDUCIAL]  147.19,53.59 0 top
JP315  LOGO-SFENW2  [SFE-NEW-WEB]  160.4,50.93 0 bottom
JP316  [1X06]  176.28,47.75 0 bottom
JP317  [1X06]  163.58,57.91 180 bottom
JP318  FIDUCIALUFIDUCIAL  [MICRO-FIDUCIAL]  175.01,51.31 0 top
JP319  FIDUCIALUFIDUCIAL  [MICRO-FIDUCIAL]  162.94,53.59 0 top
JP320  LOGO-SFENW2  [SFE-NEW-WEB]  176.15,50.93 0 bottom
JP321  [1X06]  192.02,47.75 0 bottom
JP322  [1X06]  179.32,57.91 180 bottom
JP323  FIDUCIALUFIDUCIAL  [MICRO-FIDUCIAL]  190.75,51.31 0 top
JP324  FIDUCIALUFIDUCIAL  [MICRO-FIDUCIAL]  178.69,53.59 0 top
JP325  LOGO-SFENW2  [SFE-NEW-WEB]  191.9,50.93 0 bottom
JP326  [1X06]  207.77,47.75 0 bottom
JP327  [1X06]  195.07,57.91 180 bottom
JP328  FIDUCIALUFIDUCIAL  [MICRO-FIDUCIAL]  206.5,51.31 0 top
JP329  FIDUCIALUFIDUCIAL  [MICRO-FIDUCIAL]  194.44,53.59 0 top
JP330  LOGO-SFENW2  [SFE-NEW-WEB]  207.65,50.93 0 bottom
JP331  [1X06]  129.03,60.96 0 bottom
JP332  [1X06]  116.33,71.12 180 bottom
JP333  FIDUCIALUFIDUCIAL  [MICRO-FIDUCIAL]  127.76,64.52 0 top
JP334  FIDUCIALUFIDUCIAL  [MICRO-FIDUCIAL]  115.7,66.8 0 top
JP335  LOGO-SFENW2  [SFE-NEW-WEB]  128.91,64.14 0 bottom
JP336  [1X06]  144.78,60.96 0 bottom
JP337  [1X06]  132.08,71.12 180 bottom
JP338  FIDUCIALUFIDUCIAL  [MICRO-FIDUCIAL]  143.51,64.52 0 top
JP339  FIDUCIALUFIDUCIAL  [MICRO-FIDUCIAL]  131.44,66.8 0 top
JP340  LOGO-SFENW2  [SFE-NEW-WEB]  144.65,64.14 0 bottom
JP341  [1X06]  160.53,60.96 0 bottom
JP342  [1X06]  147.83,71.12 180 bottom
JP343  FIDUCIALUFIDUCIAL  [MICRO-FIDUCIAL]  159.26,64.52 0 top
JP344  FIDUCIALUFIDUCIAL  [MICRO-FIDUCIAL]  147.19,66.8 0 top
JP345  LOGO-SFENW2  [SFE-NEW-WEB]  160.4,64.14 0 bottom
JP346  [1X06]  176.28,60.96 0 bottom
JP347  [1X06]  163.58,71.12 180 bottom
JP348  FIDUCIALUFIDUCIAL  [MICRO-FIDUCIAL]  175.01,64.52 0 top
JP349  FIDUCIALUFIDUCIAL  [MICRO-FIDUCIAL]  162.94,66.8 0 top
JP350  LOGO-SFENW2  [SFE-NEW-WEB]  176.15,64.14 0 bottom
JP351  [1X06]  192.02,60.96 0 bottom
JP352  [1X06]  179.32,71.12 180 bottom
JP353  FIDUCIALUFIDUCIAL  [MICRO-FIDUCIAL]  190.75,64.52 0 top
JP354  FIDUCIALUFIDUCIAL  [MICRO-FIDUCIAL]  178.69,66.8 0 top
JP355  LOGO-SFENW2  [SFE-NEW-WEB]  191.9,64.14 0 bottom
JP356  [1X06]  207.77,60.96 0 bottom
JP357  [1X06]  195.07,71.12 180 bottom
JP358  FIDUCIALUFIDUCIAL  [MICRO-FIDUCIAL]  206.5,64.52 0 top
JP359  FIDUCIALUFIDUCIAL  [MICRO-FIDUCIAL]  194.44,66.8 0 top
JP360  LOGO-SFENW2  [SFE-NEW-WEB]  207.65,64.14 0 bottom
JP361  [1X06]  129.03,74.17 0 bottom
JP362  [1X06]  116.33,84.33 180 bottom
JP363  FIDUCIALUFIDUCIAL  [MICRO-FIDUCIAL]  127.76,77.72 0 top
JP364  FIDUCIALUFIDUCIAL  [MICRO-FIDUCIAL]  115.7,80.01 0 top
JP365  LOGO-SFENW2  [SFE-NEW-WEB]  128.91,77.34 0 bottom
JP366  [1X06]  144.78,74.17 0 bottom
JP367  [1X06]  132.08,84.33 180 bottom
JP368  FIDUCIALUFIDUCIAL  [MICRO-FIDUCIAL]  143.51,77.72 0 top
JP369  FIDUCIALUFIDUCIAL  [MICRO-FIDUCIAL]  131.44,80.01 0 top
JP370  LOGO-SFENW2  [SFE-NEW-WEB]  144.65,77.34 0 bottom
JP371  [1X06]  160.53,74.17 0 bottom
JP372  [1X06]  147.83,84.33 180 bottom
JP373  FIDUCIALUFIDUCIAL  [MICRO-FIDUCIAL]  159.26,77.72 0 top
JP374  FIDUCIALUFIDUCIAL  [MICRO-FIDUCIAL]  147.19,80.01 0 top
JP375  LOGO-SFENW2  [SFE-NEW-WEB]  160.4,77.34 0 bottom
JP376  [1X06]  176.28,74.17 0 bottom
JP377  [1X06]  163.58,84.33 180 bottom
JP378  FIDUCIALUFIDUCIAL  [MICRO-FIDUCIAL]  175.01,77.72 0 top
JP379  FIDUCIALUFIDUCIAL  [MICRO-FIDUCIAL]  162.94,80.01 0 top
JP380  LOGO-SFENW2  [SFE-NEW-WEB]  176.15,77.34 0 bottom
JP381  [1X06]  192.02,74.17 0 bottom
JP382  [1X06]  179.32,84.33 180 bottom
JP383  FIDUCIALUFIDUCIAL  [MICRO-FIDUCIAL]  190.75,77.72 0 top
JP384  FIDUCIALUFIDUCIAL  [MICRO-FIDUCIAL]  178.69,80.01 0 top
JP385  LOGO-SFENW2  [SFE-NEW-WEB]  191.9,77.34 0 bottom
JP386  [1X06]  207.77,74.17 0 bottom
JP387  [1X06]  195.07,84.33 180 bottom
JP388  FIDUCIALUFIDUCIAL  [MICRO-FIDUCIAL]  206.5,77.72 0 top
JP389  FIDUCIALUFIDUCIAL  [MICRO-FIDUCIAL]  194.44,80.01 0 top
JP390  LOGO-SFENW2  [SFE-NEW-WEB]  207.65,77.34 0 bottom
JP391  [1X06]  129.03,87.38 0 bottom
JP392  [1X06]  116.33,97.54 180 bottom
JP393  FIDUCIALUFIDUCIAL  [MICRO-FIDUCIAL]  127.76,90.93 0 top
JP394  FIDUCIALUFIDUCIAL  [MICRO-FIDUCIAL]  115.7,93.22 0 top
JP395  LOGO-SFENW2  [SFE-NEW-WEB]  128.91,90.55 0 bottom
JP396  [1X06]  144.78,87.38 0 bottom
JP397  [1X06]  132.08,97.54 180 bottom
JP398  FIDUCIALUFIDUCIAL  [MICRO-FIDUCIAL]  143.51,90.93 0 top
JP399  FIDUCIALUFIDUCIAL  [MICRO-FIDUCIAL]  131.44,93.22 0 top
JP400  LOGO-SFENW2  [SFE-NEW-WEB]  144.65,90.55 0 bottom
JP401  [1X06]  160.53,87.38 0 bottom
JP402  [1X06]  147.83,97.54 180 bottom
JP403  FIDUCIALUFIDUCIAL  [MICRO-FIDUCIAL]  159.26,90.93 0 top
JP404  FIDUCIALUFIDUCIAL  [MICRO-FIDUCIAL]  147.19,93.22 0 top
JP405  LOGO-SFENW2  [SFE-NEW-WEB]  160.4,90.55 0 bottom
JP406  [1X06]  176.28,87.38 0 bottom
JP407  [1X06]  163.58,97.54 180 bottom
JP408  FIDUCIALUFIDUCIAL  [MICRO-FIDUCIAL]  175.01,90.93 0 top
JP409  FIDUCIALUFIDUCIAL  [MICRO-FIDUCIAL]  162.94,93.22 0 top
JP410  LOGO-SFENW2  [SFE-NEW-WEB]  176.15,90.55 0 bottom
JP411  [1X06]  192.02,87.38 0 bottom
JP412  [1X06]  179.32,97.54 180 bottom
JP413  FIDUCIALUFIDUCIAL  [MICRO-FIDUCIAL]  190.75,90.93 0 top
JP414  FIDUCIALUFIDUCIAL  [MICRO-FIDUCIAL]  178.69,93.22 0 top
JP415  LOGO-SFENW2  [SFE-NEW-WEB]  191.9,90.55 0 bottom
JP416  [1X06]  207.77,87.38 0 bottom
JP417  [1X06]  195.07,97.54 180 bottom
JP418  FIDUCIALUFIDUCIAL  [MICRO-FIDUCIAL]  206.5,90.93 0 top
JP419  FIDUCIALUFIDUCIAL  [MICRO-FIDUCIAL]  194.44,93.22 0 top
JP420  LOGO-SFENW2  [SFE-NEW-WEB]  207.65,90.55 0 bottom
JP421  [1X06]  129.03,114.3 0 bottom
JP422  [1X06]  116.33,124.46 180 bottom
JP423  FIDUCIALUFIDUCIAL  [MICRO-FIDUCIAL]  127.76,117.86 0 top
JP424  FIDUCIALUFIDUCIAL  [MICRO-FIDUCIAL]  115.7,120.14 0 top
JP425  LOGO-SFENW2  [SFE-NEW-WEB]  128.91,117.47 0 bottom
JP426  [1X06]  144.78,114.3 0 bottom
JP427  [1X06]  132.08,124.46 180 bottom
JP428  FIDUCIALUFIDUCIAL  [MICRO-FIDUCIAL]  143.51,117.86 0 top
JP429  FIDUCIALUFIDUCIAL  [MICRO-FIDUCIAL]  131.44,120.14 0 top
JP430  LOGO-SFENW2  [SFE-NEW-WEB]  144.65,117.47 0 bottom
JP431  [1X06]  160.53,114.3 0 bottom
JP432  [1X06]  147.83,124.46 180 bottom
JP433  FIDUCIALUFIDUCIAL  [MICRO-FIDUCIAL]  159.26,117.86 0 top
JP434  FIDUCIALUFIDUCIAL  [MICRO-FIDUCIAL]  147.19,120.14 0 top
JP435  LOGO-SFENW2  [SFE-NEW-WEB]  160.4,117.47 0 bottom
JP436  [1X06]  176.28,114.3 0 bottom
JP437  [1X06]  163.58,124.46 180 bottom
JP438  FIDUCIALUFIDUCIAL  [MICRO-FIDUCIAL]  175.01,117.86 0 top
JP439  FIDUCIALUFIDUCIAL  [MICRO-FIDUCIAL]  162.94,120.14 0 top
JP440  LOGO-SFENW2  [SFE-NEW-WEB]  176.15,117.47 0 bottom
JP441  [1X06]  192.02,114.3 0 bottom
JP442  [1X06]  179.32,124.46 180 bottom
JP443  FIDUCIALUFIDUCIAL  [MICRO-FIDUCIAL]  190.75,117.86 0 top
JP444  FIDUCIALUFIDUCIAL  [MICRO-FIDUCIAL]  178.69,120.14 0 top
JP445  LOGO-SFENW2  [SFE-NEW-WEB]  191.9,117.47 0 bottom
JP446  [1X06]  207.77,114.3 0 bottom
JP447  [1X06]  195.07,124.46 180 bottom
JP448  FIDUCIALUFIDUCIAL  [MICRO-FIDUCIAL]  206.5,117.86 0 top
JP449  FIDUCIALUFIDUCIAL  [MICRO-FIDUCIAL]  194.44,120.14 0 top
JP450  LOGO-SFENW2  [SFE-NEW-WEB]  207.65,117.47 0 bottom
JP451  [1X06]  129.03,127.51 0 bottom
JP452  [1X06]  116.33,137.67 180 bottom
JP453  FIDUCIALUFIDUCIAL  [MICRO-FIDUCIAL]  127.76,131.06 0 top
JP454  FIDUCIALUFIDUCIAL  [MICRO-FIDUCIAL]  115.7,133.35 0 top
JP455  LOGO-SFENW2  [SFE-NEW-WEB]  128.91,130.68 0 bottom
JP456  [1X06]  144.78,127.51 0 bottom
JP457  [1X06]  132.08,137.67 180 bottom
JP458  FIDUCIALUFIDUCIAL  [MICRO-FIDUCIAL]  143.51,131.06 0 top
JP459  FIDUCIALUFIDUCIAL  [MICRO-FIDUCIAL]  131.44,133.35 0 top
JP460  LOGO-SFENW2  [SFE-NEW-WEB]  144.65,130.68 0 bottom
JP461  [1X06]  160.53,127.51 0 bottom
JP462  [1X06]  147.83,137.67 180 bottom
JP463  FIDUCIALUFIDUCIAL  [MICRO-FIDUCIAL]  159.26,131.06 0 top
JP464  FIDUCIALUFIDUCIAL  [MICRO-FIDUCIAL]  147.19,133.35 0 top
JP465  LOGO-SFENW2  [SFE-NEW-WEB]  160.4,130.68 0 bottom
JP466  [1X06]  176.28,127.51 0 bottom
JP467  [1X06]  163.58,137.67 180 bottom
JP468  FIDUCIALUFIDUCIAL  [MICRO-FIDUCIAL]  175.01,131.06 0 top
JP469  FIDUCIALUFIDUCIAL  [MICRO-FIDUCIAL]  162.94,133.35 0 top
JP470  LOGO-SFENW2  [SFE-NEW-WEB]  176.15,130.68 0 bottom
JP471  [1X06]  192.02,127.51 0 bottom
JP472  [1X06]  179.32,137.67 180 bottom
JP473  FIDUCIALUFIDUCIAL  [MICRO-FIDUCIAL]  190.75,131.06 0 top
JP474  FIDUCIALUFIDUCIAL  [MICRO-FIDUCIAL]  178.69,133.35 0 top
JP475  LOGO-SFENW2  [SFE-NEW-WEB]  191.9,130.68 0 bottom
JP476  [1X06]  207.77,127.51 0 bottom
JP477  [1X06]  195.07,137.67 180 bottom
JP478  FIDUCIALUFIDUCIAL  [MICRO-FIDUCIAL]  206.5,131.06 0 top
JP479  FIDUCIALUFIDUCIAL  [MICRO-FIDUCIAL]  194.44,133.35 0 top
JP480  LOGO-SFENW2  [SFE-NEW-WEB]  207.65,130.68 0 bottom
JP481  [1X06]  129.03,140.72 0 bottom
JP482  [1X06]  116.33,150.88 180 bottom
JP483  FIDUCIALUFIDUCIAL  [MICRO-FIDUCIAL]  127.76,144.27 0 top
JP484  FIDUCIALUFIDUCIAL  [MICRO-FIDUCIAL]  115.7,146.56 0 top
JP485  LOGO-SFENW2  [SFE-NEW-WEB]  128.91,143.89 0 bottom
JP486  [1X06]  144.78,140.72 0 bottom
JP487  [1X06]  132.08,150.88 180 bottom
JP488  FIDUCIALUFIDUCIAL  [MICRO-FIDUCIAL]  143.51,144.27 0 top
JP489  FIDUCIALUFIDUCIAL  [MICRO-FIDUCIAL]  131.44,146.56 0 top
JP490  LOGO-SFENW2  [SFE-NEW-WEB]  144.65,143.89 0 bottom
JP491  [1X06]  160.53,140.72 0 bottom
JP492  [1X06]  147.83,150.88 180 bottom
JP493  FIDUCIALUFIDUCIAL  [MICRO-FIDUCIAL]  159.26,144.27 0 top
JP494  FIDUCIALUFIDUCIAL  [MICRO-FIDUCIAL]  147.19,146.56 0 top
JP495  LOGO-SFENW2  [SFE-NEW-WEB]  160.4,143.89 0 bottom
JP496  [1X06]  176.28,140.72 0 bottom
JP497  [1X06]  163.58,150.88 180 bottom
JP498  FIDUCIALUFIDUCIAL  [MICRO-FIDUCIAL]  175.01,144.27 0 top
JP499  FIDUCIALUFIDUCIAL  [MICRO-FIDUCIAL]  162.94,146.56 0 top
JP500  LOGO-SFENW2  [SFE-NEW-WEB]  176.15,143.89 0 bottom
JP501  [1X06]  192.02,140.72 0 bottom
JP502  [1X06]  179.32,150.88 180 bottom
JP503  FIDUCIALUFIDUCIAL  [MICRO-FIDUCIAL]  190.75,144.27 0 top
JP504  FIDUCIALUFIDUCIAL  [MICRO-FIDUCIAL]  178.69,146.56 0 top
JP505  LOGO-SFENW2  [SFE-NEW-WEB]  191.9,143.89 0 bottom
JP506  [1X06]  207.77,140.72 0 bottom
JP507  [1X06]  195.07,150.88 180 bottom
JP508  FIDUCIALUFIDUCIAL  [MICRO-FIDUCIAL]  206.5,144.27 0 top
JP509  FIDUCIALUFIDUCIAL  [MICRO-FIDUCIAL]  194.44,146.56 0 top
JP510  LOGO-SFENW2  [SFE-NEW-WEB]  207.65,143.89 0 bottom
JP511  [1X06]  129.03,153.92 0 bottom
JP512  [1X06]  116.33,164.08 180 bottom
JP513  FIDUCIALUFIDUCIAL  [MICRO-FIDUCIAL]  127.76,157.48 0 top
JP514  FIDUCIALUFIDUCIAL  [MICRO-FIDUCIAL]  115.7,159.77 0 top
JP515  LOGO-SFENW2  [SFE-NEW-WEB]  128.91,157.1 0 bottom
JP516  [1X06]  144.78,153.92 0 bottom
JP517  [1X06]  132.08,164.08 180 bottom
JP518  FIDUCIALUFIDUCIAL  [MICRO-FIDUCIAL]  143.51,157.48 0 top
JP519  FIDUCIALUFIDUCIAL  [MICRO-FIDUCIAL]  131.44,159.77 0 top
JP520  LOGO-SFENW2  [SFE-NEW-WEB]  144.65,157.1 0 bottom
JP521  [1X06]  160.53,153.92 0 bottom
JP522  [1X06]  147.83,164.08 180 bottom
JP523  FIDUCIALUFIDUCIAL  [MICRO-FIDUCIAL]  159.26,157.48 0 top
JP524  FIDUCIALUFIDUCIAL  [MICRO-FIDUCIAL]  147.19,159.77 0 top
JP525  LOGO-SFENW2  [SFE-NEW-WEB]  160.4,157.1 0 bottom
JP526  [1X06]  176.28,153.92 0 bottom
JP527  [1X06]  163.58,164.08 180 bottom
JP528  FIDUCIALUFIDUCIAL  [MICRO-FIDUCIAL]  175.01,157.48 0 top
JP529  FIDUCIALUFIDUCIAL  [MICRO-FIDUCIAL]  162.94,159.77 0 top
JP530  LOGO-SFENW2  [SFE-NEW-WEB]  176.15,157.1 0 bottom
JP531  [1X06]  192.02,153.92 0 bottom
JP532  [1X06]  179.32,164.08 180 bottom
JP533  FIDUCIALUFIDUCIAL  [MICRO-FIDUCIAL]  190.75,157.48 0 top
JP534  FIDUCIALUFIDUCIAL  [MICRO-FIDUCIAL]  178.69,159.77 0 top
JP535  LOGO-SFENW2  [SFE-NEW-WEB]  191.9,157.1 0 bottom
JP536  [1X06]  207.77,153.92 0 bottom
JP537  [1X06]  195.07,164.08 180 bottom
JP538  FIDUCIALUFIDUCIAL  [MICRO-FIDUCIAL]  206.5,157.48 0 top
JP539  FIDUCIALUFIDUCIAL  [MICRO-FIDUCIAL]  194.44,159.77 0 top
JP540  LOGO-SFENW2  [SFE-NEW-WEB]  207.65,157.1 0 bottom
JP541  [1X06]  129.03,167.13 0 bottom
JP542  [1X06]  116.33,177.29 180 bottom
JP543  FIDUCIALUFIDUCIAL  [MICRO-FIDUCIAL]  127.76,170.69 0 top
JP544  FIDUCIALUFIDUCIAL  [MICRO-FIDUCIAL]  115.7,172.97 0 top
JP545  LOGO-SFENW2  [SFE-NEW-WEB]  128.91,170.31 0 bottom
JP546  [1X06]  144.78,167.13 0 bottom
JP547  [1X06]  132.08,177.29 180 bottom
JP548  FIDUCIALUFIDUCIAL  [MICRO-FIDUCIAL]  143.51,170.69 0 top
JP549  FIDUCIALUFIDUCIAL  [MICRO-FIDUCIAL]  131.44,172.97 0 top
JP550  LOGO-SFENW2  [SFE-NEW-WEB]  144.65,170.31 0 bottom
JP551  [1X06]  160.53,167.13 0 bottom
JP552  [1X06]  147.83,177.29 180 bottom
JP553  FIDUCIALUFIDUCIAL  [MICRO-FIDUCIAL]  159.26,170.69 0 top
JP554  FIDUCIALUFIDUCIAL  [MICRO-FIDUCIAL]  147.19,172.97 0 top
JP555  LOGO-SFENW2  [SFE-NEW-WEB]  160.4,170.31 0 bottom
JP556  [1X06]  176.28,167.13 0 bottom
JP557  [1X06]  163.58,177.29 180 bottom
JP558  FIDUCIALUFIDUCIAL  [MICRO-FIDUCIAL]  175.01,170.69 0 top
JP559  FIDUCIALUFIDUCIAL  [MICRO-FIDUCIAL]  162.94,172.97 0 top
JP560  LOGO-SFENW2  [SFE-NEW-WEB]  176.15,170.31 0 bottom
JP561  [1X06]  192.02,167.13 0 bottom
JP562  [1X06]  179.32,177.29 180 bottom
JP563  FIDUCIALUFIDUCIAL  [MICRO-FIDUCIAL]  190.75,170.69 0 top
JP564  FIDUCIALUFIDUCIAL  [MICRO-FIDUCIAL]  178.69,172.97 0 top
JP565  LOGO-SFENW2  [SFE-NEW-WEB]  191.9,170.31 0 bottom
JP566  [1X06]  207.77,167.13 0 bottom
JP567  [1X06]  195.07,177.29 180 bottom
JP568  FIDUCIALUFIDUCIAL  [MICRO-FIDUCIAL]  206.5,170.69 0 top
JP569  FIDUCIALUFIDUCIAL  [MICRO-FIDUCIAL]  194.44,172.97 0 top
JP570  LOGO-SFENW2  [SFE-NEW-WEB]  207.65,170.31 0 bottom
JP571  [1X06]  129.03,180.34 0 bottom
JP572  [1X06]  116.33,190.5 180 bottom
JP573  FIDUCIALUFIDUCIAL  [MICRO-FIDUCIAL]  127.76,183.9 0 top
JP574  FIDUCIALUFIDUCIAL  [MICRO-FIDUCIAL]  115.7,186.18 0 top
JP575  LOGO-SFENW2  [SFE-NEW-WEB]  128.91,183.51 0 bottom
JP576  [1X06]  144.78,180.34 0 bottom
JP577  [1X06]  132.08,190.5 180 bottom
JP578  FIDUCIALUFIDUCIAL  [MICRO-FIDUCIAL]  143.51,183.9 0 top
JP579  FIDUCIALUFIDUCIAL  [MICRO-FIDUCIAL]  131.44,186.18 0 top
JP580  LOGO-SFENW2  [SFE-NEW-WEB]  144.65,183.51 0 bottom
JP581  [1X06]  160.53,180.34 0 bottom
JP582  [1X06]  147.83,190.5 180 bottom
JP583  FIDUCIALUFIDUCIAL  [MICRO-FIDUCIAL]  159.26,183.9 0 top
JP584  FIDUCIALUFIDUCIAL  [MICRO-FIDUCIAL]  147.19,186.18 0 top
JP585  LOGO-SFENW2  [SFE-NEW-WEB]  160.4,183.51 0 bottom
JP586  [1X06]  176.28,180.34 0 bottom
JP587  [1X06]  163.58,190.5 180 bottom
JP588  FIDUCIALUFIDUCIAL  [MICRO-FIDUCIAL]  175.01,183.9 0 top
JP589  FIDUCIALUFIDUCIAL  [MICRO-FIDUCIAL]  162.94,186.18 0 top
JP590  LOGO-SFENW2  [SFE-NEW-WEB]  176.15,183.51 0 bottom
JP591  [1X06]  192.02,180.34 0 bottom
JP592  [1X06]  179.32,190.5 180 bottom
JP593  FIDUCIALUFIDUCIAL  [MICRO-FIDUCIAL]  190.75,183.9 0 top
JP594  FIDUCIALUFIDUCIAL  [MICRO-FIDUCIAL]  178.69,186.18 0 top
JP595  LOGO-SFENW2  [SFE-NEW-WEB]  191.9,183.51 0 bottom
JP596  [1X06]  207.77,180.34 0 bottom
JP597  [1X06]  195.07,190.5 180 bottom
JP598  FIDUCIALUFIDUCIAL  [MICRO-FIDUCIAL]  206.5,183.9 0 top
JP599  FIDUCIALUFIDUCIAL  [MICRO-FIDUCIAL]  194.44,186.18 0 top
JP600  LOGO-SFENW2  [SFE-NEW-WEB]  207.65,183.51 0 bottom
JP601  [1X06]  129.03,193.55 0 bottom
JP602  [1X06]  116.33,203.71 180 bottom
JP603  FIDUCIALUFIDUCIAL  [MICRO-FIDUCIAL]  127.76,197.1 0 top
JP604  FIDUCIALUFIDUCIAL  [MICRO-FIDUCIAL]  115.7,199.39 0 top
JP605  LOGO-SFENW2  [SFE-NEW-WEB]  128.91,196.72 0 bottom
JP606  [1X06]  144.78,193.55 0 bottom
JP607  [1X06]  132.08,203.71 180 bottom
JP608  FIDUCIALUFIDUCIAL  [MICRO-FIDUCIAL]  143.51,197.1 0 top
JP609  FIDUCIALUFIDUCIAL  [MICRO-FIDUCIAL]  131.44,199.39 0 top
JP610  LOGO-SFENW2  [SFE-NEW-WEB]  144.65,196.72 0 bottom
JP611  [1X06]  160.53,193.55 0 bottom
JP612  [1X06]  147.83,203.71 180 bottom
JP613  FIDUCIALUFIDUCIAL  [MICRO-FIDUCIAL]  159.26,197.1 0 top
JP614  FIDUCIALUFIDUCIAL  [MICRO-FIDUCIAL]  147.19,199.39 0 top
JP615  LOGO-SFENW2  [SFE-NEW-WEB]  160.4,196.72 0 bottom
JP616  [1X06]  176.28,193.55 0 bottom
JP617  [1X06]  163.58,203.71 180 bottom
JP618  FIDUCIALUFIDUCIAL  [MICRO-FIDUCIAL]  175.01,197.1 0 top
JP619  FIDUCIALUFIDUCIAL  [MICRO-FIDUCIAL]  162.94,199.39 0 top
JP620  LOGO-SFENW2  [SFE-NEW-WEB]  176.15,196.72 0 bottom
JP621  [1X06]  192.02,193.55 0 bottom
JP622  [1X06]  179.32,203.71 180 bottom
JP623  FIDUCIALUFIDUCIAL  [MICRO-FIDUCIAL]  190.75,197.1 0 top
JP624  FIDUCIALUFIDUCIAL  [MICRO-FIDUCIAL]  178.69,199.39 0 top
JP625  LOGO-SFENW2  [SFE-NEW-WEB]  191.9,196.72 0 bottom
JP626  [1X06]  207.77,193.55 0 bottom
JP627  [1X06]  195.07,203.71 180 bottom
JP628  FIDUCIALUFIDUCIAL  [MICRO-FIDUCIAL]  206.5,197.1 0 top
JP629  FIDUCIALUFIDUCIAL  [MICRO-FIDUCIAL]  194.44,199.39 0 top
JP630  LOGO-SFENW2  [SFE-NEW-WEB]  207.65,196.72 0 bottom
JP631  [1X06]  20.83,114.3 0 bottom
JP632  [1X06]  8.13,124.46 180 bottom
JP633  FIDUCIALUFIDUCIAL  [MICRO-FIDUCIAL]  19.56,117.86 0 top
JP634  FIDUCIALUFIDUCIAL  [MICRO-FIDUCIAL]  7.49,120.14 0 top
JP635  LOGO-SFENW2  [SFE-NEW-WEB]  20.7,117.47 0 bottom
JP636  [1X06]  36.58,114.3 0 bottom
JP637  [1X06]  23.88,124.46 180 bottom
JP638  FIDUCIALUFIDUCIAL  [MICRO-FIDUCIAL]  35.31,117.86 0 top
JP639  FIDUCIALUFIDUCIAL  [MICRO-FIDUCIAL]  23.24,120.14 0 top
JP640  LOGO-SFENW2  [SFE-NEW-WEB]  36.45,117.47 0 bottom
JP641  [1X06]  52.32,114.3 0 bottom
JP642  [1X06]  39.62,124.46 180 bottom
JP643  FIDUCIALUFIDUCIAL  [MICRO-FIDUCIAL]  51.05,117.86 0 top
JP644  FIDUCIALUFIDUCIAL  [MICRO-FIDUCIAL]  38.99,120.14 0 top
JP645  LOGO-SFENW2  [SFE-NEW-WEB]  52.2,117.47 0 bottom
JP646  [1X06]  68.07,114.3 0 bottom
JP647  [1X06]  55.37,124.46 180 bottom
JP648  FIDUCIALUFIDUCIAL  [MICRO-FIDUCIAL]  66.8,117.86 0 top
JP649  FIDUCIALUFIDUCIAL  [MICRO-FIDUCIAL]  54.74,120.14 0 top
JP650  LOGO-SFENW2  [SFE-NEW-WEB]  67.94,117.47 0 bottom
JP651  [1X06]  83.82,114.3 0 bottom
JP652  [1X06]  71.12,124.46 180 bottom
JP653  FIDUCIALUFIDUCIAL  [MICRO-FIDUCIAL]  82.55,117.86 0 top
JP654  FIDUCIALUFIDUCIAL  [MICRO-FIDUCIAL]  70.48,120.14 0 top
JP655  LOGO-SFENW2  [SFE-NEW-WEB]  83.69,117.47 0 bottom
JP656  [1X06]  99.57,114.3 0 bottom
JP657  [1X06]  86.87,124.46 180 bottom
JP658  FIDUCIALUFIDUCIAL  [MICRO-FIDUCIAL]  98.3,117.86 0 top
JP659  FIDUCIALUFIDUCIAL  [MICRO-FIDUCIAL]  86.23,120.14 0 top
JP660  LOGO-SFENW2  [SFE-NEW-WEB]  99.44,117.47 0 bottom
JP661  [1X06]  20.83,127.51 0 bottom
JP662  [1X06]  8.13,137.67 180 bottom
JP663  FIDUCIALUFIDUCIAL  [MICRO-FIDUCIAL]  19.56,131.06 0 top
JP664  FIDUCIALUFIDUCIAL  [MICRO-FIDUCIAL]  7.49,133.35 0 top
JP665  LOGO-SFENW2  [SFE-NEW-WEB]  20.7,130.68 0 bottom
JP666  [1X06]  36.58,127.51 0 bottom
JP667  [1X06]  23.88,137.67 180 bottom
JP668  FIDUCIALUFIDUCIAL  [MICRO-FIDUCIAL]  35.31,131.06 0 top
JP669  FIDUCIALUFIDUCIAL  [MICRO-FIDUCIAL]  23.24,133.35 0 top
JP670  LOGO-SFENW2  [SFE-NEW-WEB]  36.45,130.68 0 bottom
JP671  [1X06]  52.32,127.51 0 bottom
JP672  [1X06]  39.62,137.67 180 bottom
JP673  FIDUCIALUFIDUCIAL  [MICRO-FIDUCIAL]  51.05,131.06 0 top
JP674  FIDUCIALUFIDUCIAL  [MICRO-FIDUCIAL]  38.99,133.35 0 top
JP675  LOGO-SFENW2  [SFE-NEW-WEB]  52.2,130.68 0 bottom
JP676  [1X06]  68.07,127.51 0 bottom
JP677  [1X06]  55.37,137.67 180 bottom
JP678  FIDUCIALUFIDUCIAL  [MICRO-FIDUCIAL]  66.8,131.06 0 top
JP679  FIDUCIALUFIDUCIAL  [MICRO-FIDUCIAL]  54.74,133.35 0 top
JP680  LOGO-SFENW2  [SFE-NEW-WEB]  67.94,130.68 0 bottom
JP681  [1X06]  83.82,127.51 0 bottom
JP682  [1X06]  71.12,137.67 180 bottom
JP683  FIDUCIALUFIDUCIAL  [MICRO-FIDUCIAL]  82.55,131.06 0 top
JP684  FIDUCIALUFIDUCIAL  [MICRO-FIDUCIAL]  70.48,133.35 0 top
JP685  LOGO-SFENW2  [SFE-NEW-WEB]  83.69,130.68 0 bottom
JP686  [1X06]  99.57,127.51 0 bottom
JP687  [1X06]  86.87,137.67 180 bottom
JP688  FIDUCIALUFIDUCIAL  [MICRO-FIDUCIAL]  98.3,131.06 0 top
JP689  FIDUCIALUFIDUCIAL  [MICRO-FIDUCIAL]  86.23,133.35 0 top
JP690  LOGO-SFENW2  [SFE-NEW-WEB]  99.44,130.68 0 bottom
JP691  [1X06]  20.83,140.72 0 bottom
JP692  [1X06]  8.13,150.88 180 bottom
JP693  FIDUCIALUFIDUCIAL  [MICRO-FIDUCIAL]  19.56,144.27 0 top
JP694  FIDUCIALUFIDUCIAL  [MICRO-FIDUCIAL]  7.49,146.56 0 top
JP695  LOGO-SFENW2  [SFE-NEW-WEB]  20.7,143.89 0 bottom
JP696  [1X06]  36.58,140.72 0 bottom
JP697  [1X06]  23.88,150.88 180 bottom
JP698  FIDUCIALUFIDUCIAL  [MICRO-FIDUCIAL]  35.31,144.27 0 top
JP699  FIDUCIALUFIDUCIAL  [MICRO-FIDUCIAL]  23.24,146.56 0 top
JP700  LOGO-SFENW2  [SFE-NEW-WEB]  36.45,143.89 0 bottom
JP701  [1X06]  52.32,140.72 0 bottom
JP702  [1X06]  39.62,150.88 180 bottom
JP703  FIDUCIALUFIDUCIAL  [MICRO-FIDUCIAL]  51.05,144.27 0 top
JP704  FIDUCIALUFIDUCIAL  [MICRO-FIDUCIAL]  38.99,146.56 0 top
JP705  LOGO-SFENW2  [SFE-NEW-WEB]  52.2,143.89 0 bottom
JP706  [1X06]  68.07,140.72 0 bottom
JP707  [1X06]  55.37,150.88 180 bottom
JP708  FIDUCIALUFIDUCIAL  [MICRO-FIDUCIAL]  66.8,144.27 0 top
JP709  FIDUCIALUFIDUCIAL  [MICRO-FIDUCIAL]  54.74,146.56 0 top
JP710  LOGO-SFENW2  [SFE-NEW-WEB]  67.94,143.89 0 bottom
JP711  [1X06]  83.82,140.72 0 bottom
JP712  [1X06]  71.12,150.88 180 bottom
JP713  FIDUCIALUFIDUCIAL  [MICRO-FIDUCIAL]  82.55,144.27 0 top
JP714  FIDUCIALUFIDUCIAL  [MICRO-FIDUCIAL]  70.48,146.56 0 top
JP715  LOGO-SFENW2  [SFE-NEW-WEB]  83.69,143.89 0 bottom
JP716  [1X06]  99.57,140.72 0 bottom
JP717  [1X06]  86.87,150.88 180 bottom
JP718  FIDUCIALUFIDUCIAL  [MICRO-FIDUCIAL]  98.3,144.27 0 top
JP719  FIDUCIALUFIDUCIAL  [MICRO-FIDUCIAL]  86.23,146.56 0 top
JP720  LOGO-SFENW2  [SFE-NEW-WEB]  99.44,143.89 0 bottom
JP721  [1X06]  20.83,153.92 0 bottom
JP722  [1X06]  8.13,164.08 180 bottom
JP723  FIDUCIALUFIDUCIAL  [MICRO-FIDUCIAL]  19.56,157.48 0 top
JP724  FIDUCIALUFIDUCIAL  [MICRO-FIDUCIAL]  7.49,159.77 0 top
JP725  LOGO-SFENW2  [SFE-NEW-WEB]  20.7,157.1 0 bottom
JP726  [1X06]  36.58,153.92 0 bottom
JP727  [1X06]  23.88,164.08 180 bottom
JP728  FIDUCIALUFIDUCIAL  [MICRO-FIDUCIAL]  35.31,157.48 0 top
JP729  FIDUCIALUFIDUCIAL  [MICRO-FIDUCIAL]  23.24,159.77 0 top
JP730  LOGO-SFENW2  [SFE-NEW-WEB]  36.45,157.1 0 bottom
JP731  [1X06]  52.32,153.92 0 bottom
JP732  [1X06]  39.62,164.08 180 bottom
JP733  FIDUCIALUFIDUCIAL  [MICRO-FIDUCIAL]  51.05,157.48 0 top
JP734  FIDUCIALUFIDUCIAL  [MICRO-FIDUCIAL]  38.99,159.77 0 top
JP735  LOGO-SFENW2  [SFE-NEW-WEB]  52.2,157.1 0 bottom
JP736  [1X06]  68.07,153.92 0 bottom
JP737  [1X06]  55.37,164.08 180 bottom
JP738  FIDUCIALUFIDUCIAL  [MICRO-FIDUCIAL]  66.8,157.48 0 top
JP739  FIDUCIALUFIDUCIAL  [MICRO-FIDUCIAL]  54.74,159.77 0 top
JP740  LOGO-SFENW2  [SFE-NEW-WEB]  67.94,157.1 0 bottom
JP741  [1X06]  83.82,153.92 0 bottom
JP742  [1X06]  71.12,164.08 180 bottom
JP743  FIDUCIALUFIDUCIAL  [MICRO-FIDUCIAL]  82.55,157.48 0 top
JP744  FIDUCIALUFIDUCIAL  [MICRO-FIDUCIAL]  70.48,159.77 0 top
JP745  LOGO-SFENW2  [SFE-NEW-WEB]  83.69,157.1 0 bottom
JP746  [1X06]  99.57,153.92 0 bottom
JP747  [1X06]  86.87,164.08 180 bottom
JP748  FIDUCIALUFIDUCIAL  [MICRO-FIDUCIAL]  98.3,157.48 0 top
JP749  FIDUCIALUFIDUCIAL  [MICRO-FIDUCIAL]  86.23,159.77 0 top
JP750  LOGO-SFENW2  [SFE-NEW-WEB]  99.44,157.1 0 bottom
JP751  [1X06]  20.83,167.13 0 bottom
JP752  [1X06]  8.13,177.29 180 bottom
JP753  FIDUCIALUFIDUCIAL  [MICRO-FIDUCIAL]  19.56,170.69 0 top
JP754  FIDUCIALUFIDUCIAL  [MICRO-FIDUCIAL]  7.49,172.97 0 top
JP755  LOGO-SFENW2  [SFE-NEW-WEB]  20.7,170.31 0 bottom
JP756  [1X06]  36.58,167.13 0 bottom
JP757  [1X06]  23.88,177.29 180 bottom
JP758  FIDUCIALUFIDUCIAL  [MICRO-FIDUCIAL]  35.31,170.69 0 top
JP759  FIDUCIALUFIDUCIAL  [MICRO-FIDUCIAL]  23.24,172.97 0 top
JP760  LOGO-SFENW2  [SFE-NEW-WEB]  36.45,170.31 0 bottom
JP761  [1X06]  52.32,167.13 0 bottom
JP762  [1X06]  39.62,177.29 180 bottom
JP763  FIDUCIALUFIDUCIAL  [MICRO-FIDUCIAL]  51.05,170.69 0 top
JP764  FIDUCIALUFIDUCIAL  [MICRO-FIDUCIAL]  38.99,172.97 0 top
JP765  LOGO-SFENW2  [SFE-NEW-WEB]  52.2,170.31 0 bottom
JP766  [1X06]  68.07,167.13 0 bottom
JP767  [1X06]  55.37,177.29 180 bottom
JP768  FIDUCIALUFIDUCIAL  [MICRO-FIDUCIAL]  66.8,170.69 0 top
JP769  FIDUCIALUFIDUCIAL  [MICRO-FIDUCIAL]  54.74,172.97 0 top
JP770  LOGO-SFENW2  [SFE-NEW-WEB]  67.94,170.31 0 bottom
JP771  [1X06]  83.82,167.13 0 bottom
JP772  [1X06]  71.12,177.29 180 bottom
JP773  FIDUCIALUFIDUCIAL  [MICRO-FIDUCIAL]  82.55,170.69 0 top
JP774  FIDUCIALUFIDUCIAL  [MICRO-FIDUCIAL]  70.48,172.97 0 top
JP775  LOGO-SFENW2  [SFE-NEW-WEB]  83.69,170.31 0 bottom
JP776  [1X06]  99.57,167.13 0 bottom
JP777  [1X06]  86.87,177.29 180 bottom
JP778  FIDUCIALUFIDUCIAL  [MICRO-FIDUCIAL]  98.3,170.69 0 top
JP779  FIDUCIALUFIDUCIAL  [MICRO-FIDUCIAL]  86.23,172.97 0 top
JP780  LOGO-SFENW2  [SFE-NEW-WEB]  99.44,170.31 0 bottom
JP781  [1X06]  20.83,180.34 0 bottom
JP782  [1X06]  8.13,190.5 180 bottom
JP783  FIDUCIALUFIDUCIAL  [MICRO-FIDUCIAL]  19.56,183.9 0 top
JP784  FIDUCIALUFIDUCIAL  [MICRO-FIDUCIAL]  7.49,186.18 0 top
JP785  LOGO-SFENW2  [SFE-NEW-WEB]  20.7,183.51 0 bottom
JP786  [1X06]  36.58,180.34 0 bottom
JP787  [1X06]  23.88,190.5 180 bottom
JP788  FIDUCIALUFIDUCIAL  [MICRO-FIDUCIAL]  35.31,183.9 0 top
JP789  FIDUCIALUFIDUCIAL  [MICRO-FIDUCIAL]  23.24,186.18 0 top
JP790  LOGO-SFENW2  [SFE-NEW-WEB]  36.45,183.51 0 bottom
JP791  [1X06]  52.32,180.34 0 bottom
JP792  [1X06]  39.62,190.5 180 bottom
JP793  FIDUCIALUFIDUCIAL  [MICRO-FIDUCIAL]  51.05,183.9 0 top
JP794  FIDUCIALUFIDUCIAL  [MICRO-FIDUCIAL]  38.99,186.18 0 top
JP795  LOGO-SFENW2  [SFE-NEW-WEB]  52.2,183.51 0 bottom
JP796  [1X06]  68.07,180.34 0 bottom
JP797  [1X06]  55.37,190.5 180 bottom
JP798  FIDUCIALUFIDUCIAL  [MICRO-FIDUCIAL]  66.8,183.9 0 top
JP799  FIDUCIALUFIDUCIAL  [MICRO-FIDUCIAL]  54.74,186.18 0 top
JP800  LOGO-SFENW2  [SFE-NEW-WEB]  67.94,183.51 0 bottom
JP801  [1X06]  83.82,180.34 0 bottom
JP802  [1X06]  71.12,190.5 180 bottom
JP803  FIDUCIALUFIDUCIAL  [MICRO-FIDUCIAL]  82.55,183.9 0 top
JP804  FIDUCIALUFIDUCIAL  [MICRO-FIDUCIAL]  70.48,186.18 0 top
JP805  LOGO-SFENW2  [SFE-NEW-WEB]  83.69,183.51 0 bottom
JP806  [1X06]  99.57,180.34 0 bottom
JP807  [1X06]  86.87,190.5 180 bottom
JP808  FIDUCIALUFIDUCIAL  [MICRO-FIDUCIAL]  98.3,183.9 0 top
JP809  FIDUCIALUFIDUCIAL  [MICRO-FIDUCIAL]  86.23,186.18 0 top
JP810  LOGO-SFENW2  [SFE-NEW-WEB]  99.44,183.51 0 bottom
JP811  [1X06]  20.83,193.55 0 bottom
JP812  [1X06]  8.13,203.71 180 bottom
JP813  FIDUCIALUFIDUCIAL  [MICRO-FIDUCIAL]  19.56,197.1 0 top
JP814  FIDUCIALUFIDUCIAL  [MICRO-FIDUCIAL]  7.49,199.39 0 top
JP815  LOGO-SFENW2  [SFE-NEW-WEB]  20.7,196.72 0 bottom
JP816  [1X06]  36.58,193.55 0 bottom
JP817  [1X06]  23.88,203.71 180 bottom
JP818  FIDUCIALUFIDUCIAL  [MICRO-FIDUCIAL]  35.31,197.1 0 top
JP819  FIDUCIALUFIDUCIAL  [MICRO-FIDUCIAL]  23.24,199.39 0 top
JP820  LOGO-SFENW2  [SFE-NEW-WEB]  36.45,196.72 0 bottom
JP821  [1X06]  52.32,193.55 0 bottom
JP822  [1X06]  39.62,203.71 180 bottom
JP823  FIDUCIALUFIDUCIAL  [MICRO-FIDUCIAL]  51.05,197.1 0 top
JP824  FIDUCIALUFIDUCIAL  [MICRO-FIDUCIAL]  38.99,199.39 0 top
JP825  LOGO-SFENW2  [SFE-NEW-WEB]  52.2,196.72 0 bottom
JP826  [1X06]  68.07,193.55 0 bottom
JP827  [1X06]  55.37,203.71 180 bottom
JP828  FIDUCIALUFIDUCIAL  [MICRO-FIDUCIAL]  66.8,197.1 0 top
JP829  FIDUCIALUFIDUCIAL  [MICRO-FIDUCIAL]  54.74,199.39 0 top
JP830  LOGO-SFENW2  [SFE-NEW-WEB]  67.94,196.72 0 bottom
JP831  [1X06]  83.82,193.55 0 bottom
JP832  [1X06]  71.12,203.71 180 bottom
JP833  FIDUCIALUFIDUCIAL  [MICRO-FIDUCIAL]  82.55,197.1 0 top
JP834  FIDUCIALUFIDUCIAL  [MICRO-FIDUCIAL]  70.48,199.39 0 top
JP835  LOGO-SFENW2  [SFE-NEW-WEB]  83.69,196.72 0 bottom
JP836  [1X06]  99.57,193.55 0 bottom
JP837  [1X06]  86.87,203.71 180 bottom
JP838  FIDUCIALUFIDUCIAL  [MICRO-FIDUCIAL]  98.3,197.1 0 top
JP839  FIDUCIALUFIDUCIAL  [MICRO-FIDUCIAL]  86.23,199.39 0 top
JP840  LOGO-SFENW2  [SFE-NEW-WEB]  99.44,196.72 0 bottom
Q1  BSS138  [SOT23-3]  9.4,13.21 0 top
Q2  BSS138  [SOT23-3]  19.56,13.21 0 top
Q3  BSS138  [SOT23-3]  35.31,13.21 0 top
Q4  BSS138  [SOT23-3]  25.15,13.21 0 top
Q5  BSS138  [SOT23-3]  51.05,13.21 0 top
Q6  BSS138  [SOT23-3]  40.89,13.21 0 top
Q7  BSS138  [SOT23-3]  66.8,13.21 0 top
Q8  BSS138  [SOT23-3]  56.64,13.21 0 top
Q9  BSS138  [SOT23-3]  82.55,13.21 0 top
Q10  BSS138  [SOT23-3]  72.39,13.21 0 top
Q11  BSS138  [SOT23-3]  98.3,13.21 0 top
Q12  BSS138  [SOT23-3]  88.14,13.21 0 top
Q13  BSS138  [SOT23-3]  19.56,26.42 0 top
Q14  BSS138  [SOT23-3]  9.4,26.42 0 top
Q15  BSS138  [SOT23-3]  35.31,26.42 0 top
Q16  BSS138  [SOT23-3]  25.15,26.42 0 top
Q17  BSS138  [SOT23-3]  51.05,26.42 0 top
Q18  BSS138  [SOT23-3]  40.89,26.42 0 top
Q19  BSS138  [SOT23-3]  66.8,26.42 0 top
Q20  BSS138  [SOT23-3]  56.64,26.42 0 top
Q21  BSS138  [SOT23-3]  82.55,26.42 0 top
Q22  BSS138  [SOT23-3]  72.39,26.42 0 top
Q23  BSS138  [SOT23-3]  98.3,26.42 0 top
Q24  BSS138  [SOT23-3]  88.14,26.42 0 top
Q25  BSS138  [SOT23-3]  19.56,39.62 0 top
Q26  BSS138  [SOT23-3]  9.4,39.62 0 top
Q27  BSS138  [SOT23-3]  35.31,39.62 0 top
Q28  BSS138  [SOT23-3]  25.15,39.62 0 top
Q29  BSS138  [SOT23-3]  51.05,39.62 0 top
Q30  BSS138  [SOT23-3]  40.89,39.62 0 top
Q31  BSS138  [SOT23-3]  66.8,39.62 0 top
Q32  BSS138  [SOT23-3]  56.64,39.62 0 top
Q33  BSS138  [SOT23-3]  82.55,39.62 0 top
Q34  BSS138  [SOT23-3]  72.39,39.62 0 top
Q35  BSS138  [SOT23-3]  98.3,39.62 0 top
Q36  BSS138  [SOT23-3]  88.14,39.62 0 top
Q37  BSS138  [SOT23-3]  19.56,52.83 0 top
Q38  BSS138  [SOT23-3]  9.4,52.83 0 top
Q39  BSS138  [SOT23-3]  35.31,52.83 0 top
Q40  BSS138  [SOT23-3]  25.15,52.83 0 top
Q41  BSS138  [SOT23-3]  51.05,52.83 0 top
Q42  BSS138  [SOT23-3]  40.89,52.83 0 top
Q43  BSS138  [SOT23-3]  66.8,52.83 0 top
Q44  BSS138  [SOT23-3]  56.64,52.83 0 top
Q45  BSS138  [SOT23-3]  82.55,52.83 0 top
Q46  BSS138  [SOT23-3]  72.39,52.83 0 top
Q47  BSS138  [SOT23-3]  98.3,52.83 0 top
Q48  BSS138  [SOT23-3]  88.14,52.83 0 top
Q49  BSS138  [SOT23-3]  19.56,66.04 0 top
Q50  BSS138  [SOT23-3]  9.4,66.04 0 top
Q51  BSS138  [SOT23-3]  35.31,66.04 0 top
Q52  BSS138  [SOT23-3]  25.15,66.04 0 top
Q53  BSS138  [SOT23-3]  51.05,66.04 0 top
Q54  BSS138  [SOT23-3]  40.89,66.04 0 top
Q55  BSS138  [SOT23-3]  66.8,66.04 0 top
Q56  BSS138  [SOT23-3]  56.64,66.04 0 top
Q57  BSS138  [SOT23-3]  82.55,66.04 0 top
Q58  BSS138  [SOT23-3]  72.39,66.04 0 top
Q59  BSS138  [SOT23-3]  98.3,66.04 0 top
Q60  BSS138  [SOT23-3]  88.14,66.04 0 top
Q61  BSS138  [SOT23-3]  19.56,79.25 0 top
Q62  BSS138  [SOT23-3]  9.4,79.25 0 top
Q63  BSS138  [SOT23-3]  35.31,79.25 0 top
Q64  BSS138  [SOT23-3]  25.15,79.25 0 top
Q65  BSS138  [SOT23-3]  51.05,79.25 0 top
Q66  BSS138  [SOT23-3]  40.89,79.25 0 top
Q67  BSS138  [SOT23-3]  66.8,79.25 0 top
Q68  BSS138  [SOT23-3]  56.64,79.25 0 top
Q69  BSS138  [SOT23-3]  82.55,79.25 0 top
Q70  BSS138  [SOT23-3]  72.39,79.25 0 top
Q71  BSS138  [SOT23-3]  98.3,79.25 0 top
Q72  BSS138  [SOT23-3]  88.14,79.25 0 top
Q73  BSS138  [SOT23-3]  19.56,92.46 0 top
Q74  BSS138  [SOT23-3]  9.4,92.46 0 top
Q75  BSS138  [SOT23-3]  35.31,92.46 0 top
Q76  BSS138  [SOT23-3]  25.15,92.46 0 top
Q77  BSS138  [SOT23-3]  51.05,92.46 0 top
Q78  BSS138  [SOT23-3]  40.89,92.46 0 top
Q79  BSS138  [SOT23-3]  66.8,92.46 0 top
Q80  BSS138  [SOT23-3]  56.64,92.46 0 top
Q81  BSS138  [SOT23-3]  82.55,92.46 0 top
Q82  BSS138  [SOT23-3]  72.39,92.46 0 top
Q83  BSS138  [SOT23-3]  98.3,92.46 0 top
Q84  BSS138  [SOT23-3]  88.14,92.46 0 top
Q85  BSS138  [SOT23-3]  127.76,13.21 0 top
Q86  BSS138  [SOT23-3]  117.6,13.21 0 top
Q87  BSS138  [SOT23-3]  143.51,13.21 0 top
Q88  BSS138  [SOT23-3]  133.35,13.21 0 top
Q89  BSS138  [SOT23-3]  159.26,13.21 0 top
Q90  BSS138  [SOT23-3]  149.1,13.21 0 top
Q91  BSS138  [SOT23-3]  175.01,13.21 0 top
Q92  BSS138  [SOT23-3]  164.85,13.21 0 top
Q93  BSS138  [SOT23-3]  190.75,13.21 0 top
Q94  BSS138  [SOT23-3]  180.59,13.21 0 top
Q95  BSS138  [SOT23-3]  206.5,13.21 0 top
Q96  BSS138  [SOT23-3]  196.34,13.21 0 top
Q97  BSS138  [SOT23-3]  127.76,26.42 0 top
Q98  BSS138  [SOT23-3]  117.6,26.42 0 top
Q99  BSS138  [SOT23-3]  143.51,26.42 0 top
Q100  BSS138  [SOT23-3]  133.35,26.42 0 top
Q101  BSS138  [SOT23-3]  159.26,26.42 0 top
Q102  BSS138  [SOT23-3]  149.1,26.42 0 top
Q103  BSS138  [SOT23-3]  175.01,26.42 0 top
Q104  BSS138  [SOT23-3]  164.85,26.42 0 top
Q105  BSS138  [SOT23-3]  190.75,26.42 0 top
Q106  BSS138  [SOT23-3]  180.59,26.42 0 top
Q107  BSS138  [SOT23-3]  206.5,26.42 0 top
Q108  BSS138  [SOT23-3]  196.34,26.42 0 top
Q109  BSS138  [SOT23-3]  127.76,39.62 0 top
Q110  BSS138  [SOT23-3]  117.6,39.62 0 top
Q111  BSS138  [SOT23-3]  143.51,39.62 0 top
Q112  BSS138  [SOT23-3]  133.35,39.62 0 top
Q113  BSS138  [SOT23-3]  159.26,39.62 0 top
Q114  BSS138  [SOT23-3]  149.1,39.62 0 top
Q115  BSS138  [SOT23-3]  175.01,39.62 0 top
Q116  BSS138  [SOT23-3]  164.85,39.62 0 top
Q117  BSS138  [SOT23-3]  190.75,39.62 0 top
Q118  BSS138  [SOT23-3]  180.59,39.62 0 top
Q119  BSS138  [SOT23-3]  206.5,39.62 0 top